# EAGLE board The Flying Jalapeno-panel_v10 (EAGLE 7.5.0), part 1 of 4
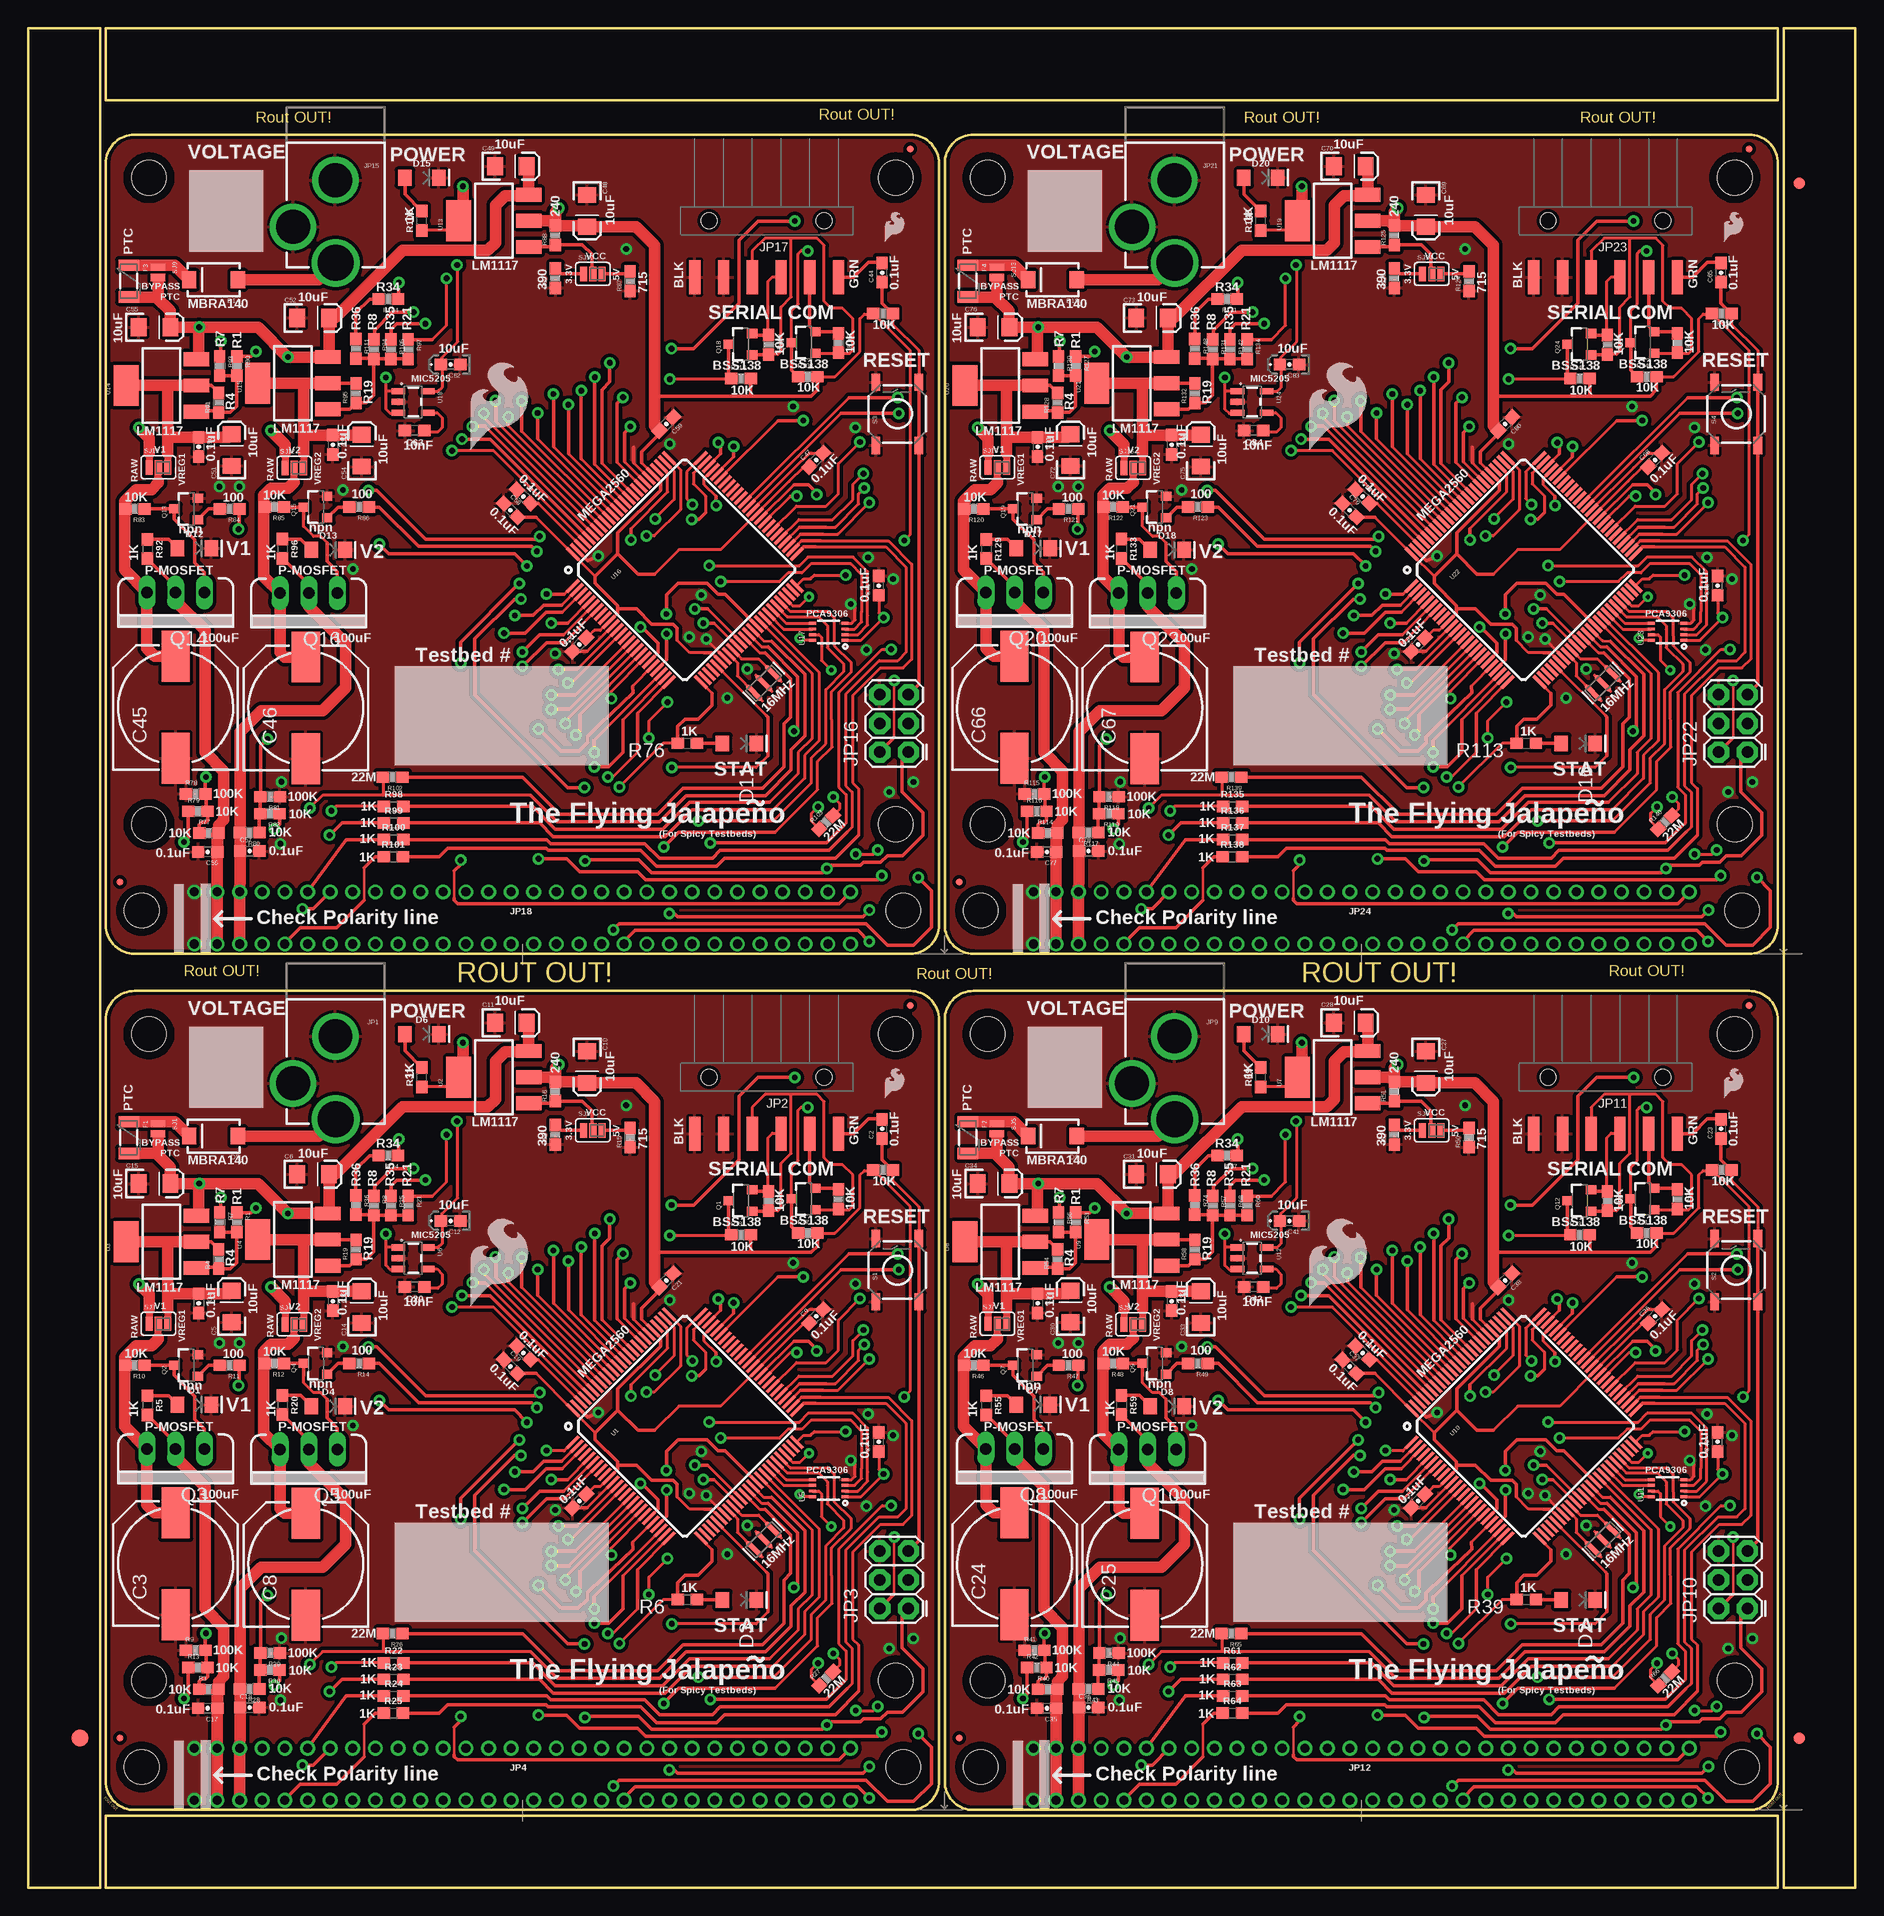
[diagram p0: board, top side]
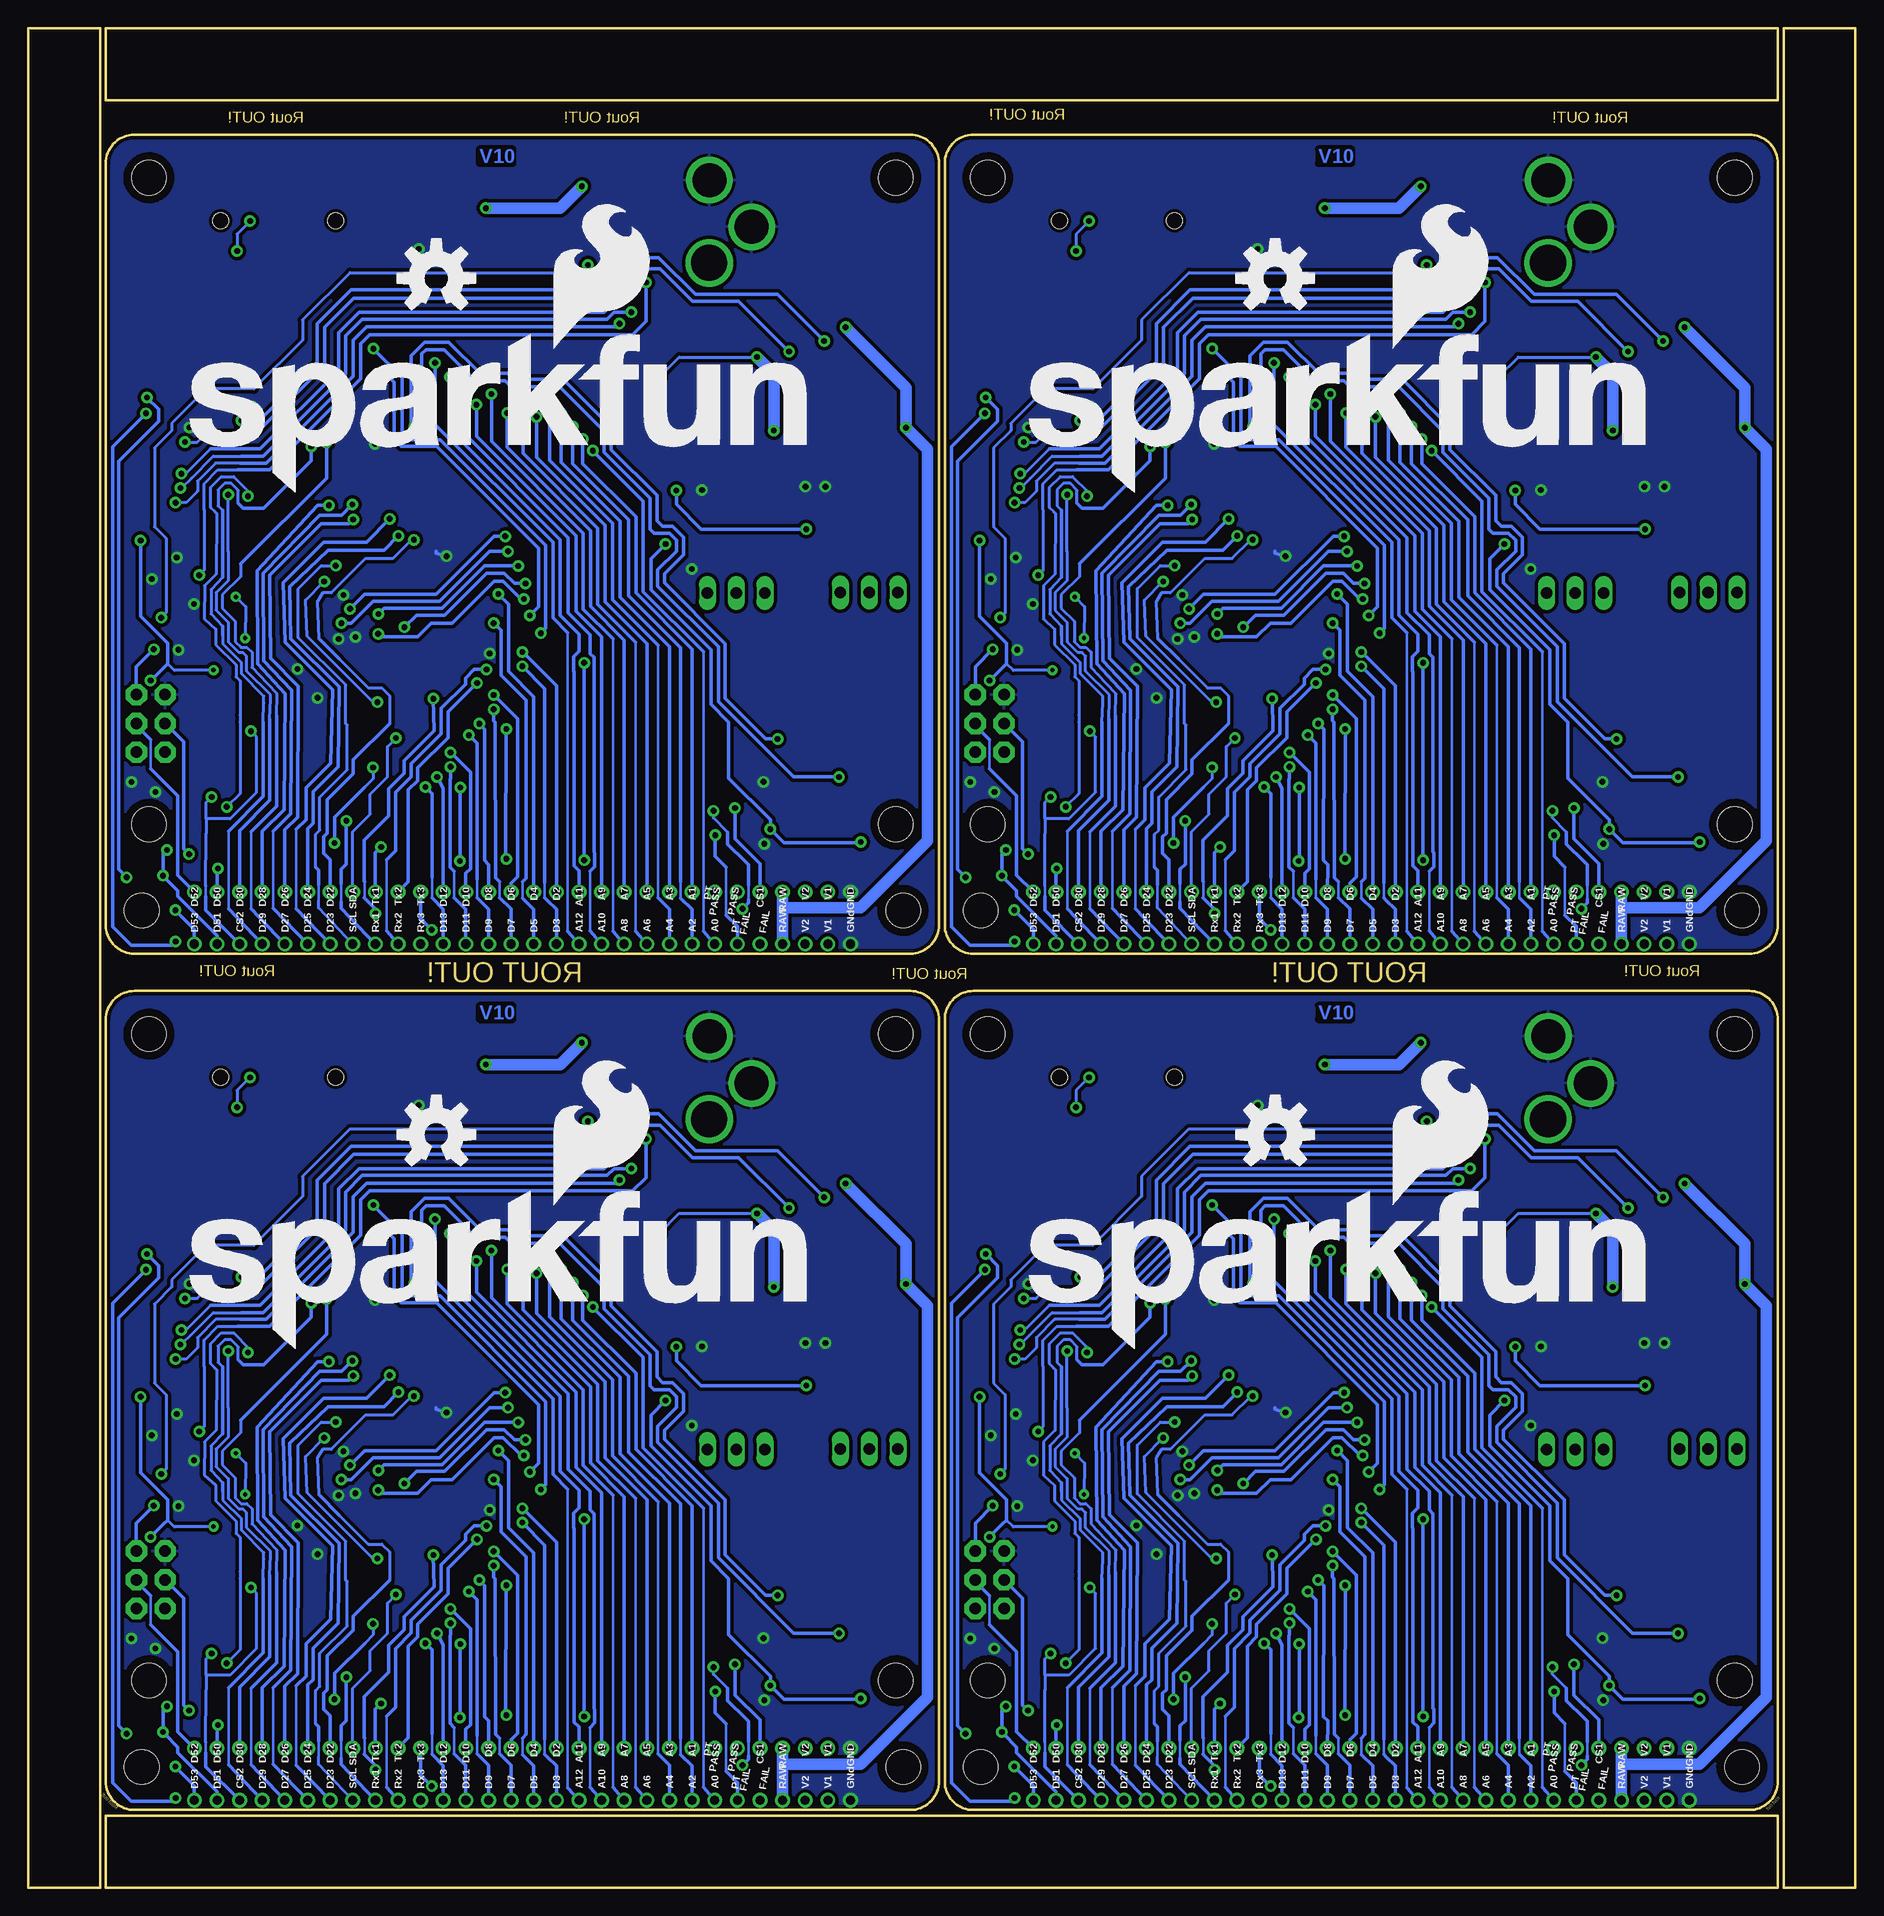
[diagram p1: board, bottom side, seen from below]

Size 161.54 x 164.34 mm. Coordinates in mm from the lower left corner, seen from the top.
Outline: 6.35,79.25 6.35,0 0,0 0,29.72
Outline: 0,27.18 0,164.34 6.35,164.34 6.35,76.71
Outline: 79.25,0 6.86,0 6.86,6.35 29.72,6.35
Outline: 27.18,6.35 154.69,6.35 154.69,0 76.71,0
Outline: 82.3,164.34 154.69,164.34 154.69,157.99 131.83,157.99
Outline: 134.37,157.99 6.86,157.99 6.86,164.34 84.84,164.34
Outline: 155.19,82.55 155.19,164.34 161.54,164.34 161.54,132.08
Outline: 161.54,134.62 161.54,0 155.19,0 155.19,85.09
Outline: 6.86,76.71 6.86,9.4 arc90 9.4,6.86 77.98,6.86 arc90 80.52,9.4 80.52,76.71 arc90 77.98,79.25 9.4,79.25 arc90 6.86,76.71
Outline: 81.03,76.71 81.03,9.4 arc90 83.57,6.86 152.15,6.86 arc90 154.69,9.4 154.69,76.71 arc90 152.15,79.25 83.57,79.25 arc90 81.03,76.71
Outline: 6.86,152.4 6.86,85.09 arc90 9.4,82.55 77.98,82.55 arc90 80.52,85.09 80.52,152.4 arc90 77.98,154.94 9.4,154.94 arc90 6.86,152.4
Outline: 81.03,152.4 81.03,85.09 arc90 83.57,82.55 152.15,82.55 arc90 154.69,85.09 154.69,152.4 arc90 152.15,154.94 83.57,154.94 arc90 81.03,152.4
Copper layers (1*16): Top 0.035mm / dielectric 1.5mm / Bottom 0.035mm
Design rules "SparkFun *": minimum track width 7mil, minimum drill 15mil, track to track 8mil, track to pad 8mil, pad to pad 8mil, via to via 8mil, smd to smd 8mil, copper to edge 8mil, drill to drill 8mil, minimum pad ring 10mil, minimum via ring 10mil, stop-mask expansion 4mil, vias tented up to drill 20mil, thermal gap 10mil
Net classes: 0 default: width 0.203 mm; 1 BIG: width 0.203 mm; 2 POWER: width 0.203 mm; 10 12_mil: width 0.305 mm, drill 0.381 mm; 11 15_mil: width 0.381 mm, drill 0.381 mm
tRestrict: area 72.1,36.2 to 72.4,36.3; area 146.3,36.2 to 146.6,36.3; area 72.1,111.9 to 72.4,112; area 146.3,111.9 to 146.6,112

## Footprints (pad centres in the part's own frame; a part is rotated, then mirrored left to right if it is on the bottom)
0603-CAP = smd 1.1 x 1: 1 -0.85,0; 2 0.85,0
NIC_10X10.5_CAP = smd 4.5 x 2.5: + 4.5,0; - -4.5,0
EIA3216 = smd 1.4 x 1.6: A 1.4,0; C -1.4,0
0603-POL = smd 1.1 x 1: A 0.85,0; K -0.85,0
0603 = smd 1.1 x 1: 1 -0.85,0; 2 0.85,0
LED-1206 = smd 1.2 x 1.4: A -1.5,0; C 1.5,0
SMA-DIODE = smd 1.27 x 1.47: A -2.15,0; C 2.15,0
FIDUCIAL-1.5X3 = smd 1.5 x 1.5: 1 0,0
FIDUCIAL-1X2 = smd 1 x 1: 1 0,0
PTC-1206 = smd 1 x 1.8: 1 -1.4,0; 2 1.4,0
POWER_JACK_PTH_LOCK = drill 2.997 pad 4.115: GND 0.025,6.557; GNDBREAK 3.762,10.7 | drill 3.2 pad 4.115: PWR 0,13.878
FTDI_DEVICE_RA_SMT = smd 1 x 3: 1 -6.35,5; 2 -3.81,5; 3 -1.27,5; 4 1.27,5; 5 3.81,5; 6 6.35,5 | hole 1.4: -5.08,0; 5.08,0
2X3 = drill 1.016 pad 1.88 octagon: 1 0,0; 2 0,2.54; 3 2.54,0; 4 2.54,2.54; 5 5.08,0; 6 5.08,2.54
FLYING_JALAPENO_V2_F = drill 0.8 pad 1.25: 1 -29,5.45; 2 -27,5.45; 3 -25,5.45; 4 -23,5.45; 5 -21,5.45; 6 -19,5.45; 7 -17,5.45; 8 -15,5.45; 9 -13,5.45; 10 -11,5.45; 11 -9,5.45; 12 -7,5.45; 13 -5,5.45; 14 -3,5.45; 15 -1,5.45; 16 1,5.45; 17 3,5.45; 18 5,5.45; 19 7,5.45; 20 9,5.45; 21 11,5.45; 22 13,5.45; 23 15,5.45; 24 17,5.45; 25 19,5.45; 26 21,5.45; 27 23,5.45; 28 25,5.45; 29 27,5.45; 30 29,5.45; 31 -29,0.85; 32 -27,0.85; 33 -25,0.85; 34 -23,0.85; 35 -21,0.85; 36 -19,0.85; 37 -17,0.85; 38 -15,0.85; 39 -13,0.85; 40 -11,0.85; 41 -9,0.85; 42 -7,0.85; 43 -5,0.85; 44 -3,0.85; 45 -1,0.85; 46 1,0.85; 47 3,0.85; 48 5,0.85; 49 7,0.85; 50 9,0.85; 51 11,0.85; 52 13,0.85; 53 15,0.85; 54 17,0.85; 55 19,0.85; 56 21,0.85; 57 23,0.85; 58 25,0.85; 59 27,0.85; 60 29,0.85 | hole 3.048: 33.655,3.81; -33.655,3.81
MICRO-FIDUCIAL = smd 0.635 x 0.635: 1 0,0
SOT23-3 = smd 0.8 x 0.9: 1 -0.95,-1; 2 0.95,-1; 3 0,1.1
TO220V = drill 1.016 long: 1 -2.54,0; 2 0,0; 3 2.54,0
0603-RES = smd 1.1 x 1: 1 -0.85,0; 2 0.85,0
TACTILE-SWITCH-SMD = smd 1.524 x 0.762: 1 -2.794,1.905; 2 2.794,1.905; 3 -2.794,-1.905; 4 2.794,-1.905
PAD-JUMPER-2-NO_NO_SILK = smd 0.635 x 1.27: 1 -0.45,0; 2 0.45,0
PAD-JUMPER-3-2OF3_NC_BY_PASTE_YES_SILK_FULL_BOX = smd 0.635 x 1.27: 1 -0.813,0; 2 0,0; 3 0.813,0
STAND-OFF-TIGHT = hole 3.048: 0,0
TQFP100 = smd 1.5 x 0.3: 1 -8,6; 2 -8,5.5; 3 -8,5; 4 -8,4.5; 5 -8,4; 6 -8,3.5; 7 -8,3; 8 -8,2.5; 9 -8,2; 10 -8,1.5; 11 -8,1; 12 -8,0.5; 13 -8,0; 14 -8,-0.5; 15 -8,-1; 16 -8,-1.5; 17 -8,-2; 18 -8,-2.5; 19 -8,-3; 20 -8,-3.5; 21 -8,-4; 22 -8,-4.5; 23 -8,-5; 24 -8,-5.5; 25 -8,-6; 51 8,-6; 52 8,-5.5; 53 8,-5; 54 8,-4.5; 55 8,-4; 56 8,-3.5; 57 8,-3; 58 8,-2.5; 59 8,-2; 60 8,-1.5; 61 8,-1; 62 8,-0.5; 63 8,0; 64 8,0.5; 65 8,1; 66 8,1.5; 67 8,2; 68 8,2.5; 69 8,3; 70 8,3.5; 71 8,4; 72 8,4.5; 73 8,5; 74 8,5.5; 75 8,6 | smd 0.3 x 1.5: 26 -6,-8; 27 -5.5,-8; 28 -5,-8; 29 -4.5,-8; 30 -4,-8; 31 -3.5,-8; 32 -3,-8; 33 -2.5,-8; 34 -2,-8; 35 -1.5,-8; 36 -1,-8; 37 -0.5,-8; 38 0,-8; 39 0.5,-8; 40 1,-8; 41 1.5,-8; 42 2,-8; 43 2.5,-8; 44 3,-8; 45 3.5,-8; 46 4,-8; 47 4.5,-8; 48 5,-8; 49 5.5,-8; 50 6,-8; 76 6,8; 77 5.5,8; 78 5,8; 79 4.5,8; 80 4,8; 81 3.5,8; 82 3,8; 83 2.5,8; 84 2,8; 85 1.5,8; 86 1,8; 87 0.5,8; 88 0,8; 89 -0.5,8; 90 -1,8; 91 -1.5,8; 92 -2,8; 93 -2.5,8; 94 -3,8; 95 -3.5,8; 96 -4,8; 97 -4.5,8; 98 -5,8; 99 -5.5,8; 100 -6,8
SOT223 = smd 1.219 x 2.235: 1 -2.311,-3.099; 2 0,-3.099; 3 2.311,-3.099 | smd 3.6 x 2.2: 4 0,3.099
PCA9306DC-1:1 = smd 0.25 x 0.602: 1 -0.73,-1.446; 2 -0.23,-1.446; 3 0.27,-1.446; 4 0.77,-1.446; 5 0.77,1.431; 6 0.27,1.431; 7 -0.23,1.431; 8 -0.73,1.431
SOT23-5 = smd 0.55 x 1.2: 1 -0.95,-1.3; 2 0,-1.3; 3 0.95,-1.3; 4 0.95,1.3; 5 -0.95,1.3
RESONATOR-SMD = smd 0.45 x 1.905: 1 -1.2,0; 2 0,0; 3 1.2,0

## Placement (x,y rotation side)
C1  0.1uF  [0603-CAP]  43.79,47.27 315 top
C2  0.1uF  [0603-CAP]  75.49,67.06 90 top
C3  100uF  [NIC_10X10.5_CAP]  13.03,28.63 90 top
C4  0.1uF  [0603-CAP]  15.06,51.64 270 top
C5  10uF  [EIA3216]  17.98,51.36 90 top
C6  10uF  [EIA3216]  25.18,63.04 0 top
C7  0.1uF  [0603-CAP]  75.19,39.39 90 top
C8  100uF  [NIC_10X10.5_CAP]  24.54,28.57 90 top
C9  0.1uF  [0603-CAP]  69.65,50.5 45 top
C10  10uF  [EIA3216]  49.4,72.52 270 top
C11  10uF  [EIA3216]  42.67,76.45 0 top
C12  10uF  [0603-POL]  37.34,58.93 180 top
C13  0.1uF  [0603-CAP]  26.92,51.84 270 top
C14  10uF  [EIA3216]  29.49,51.31 90 top
C15  10uF  [EIA3216]  11.18,62.23 0 top
C16  0.1uF  [0603-CAP]  117.96,47.27 315 top
C17  0.1uF  [0603-CAP]  15.88,15.85 180 top
C18  0.1uF  [0603-CAP]  19.58,15.93 0 top
C19  0.1uF  [0603-CAP]  42.64,46.05 315 top
C20  10nF  [0603]  34.16,53.09 180 top
C21  0.1uF  [0603-CAP]  56.41,53.67 225 top
C22  0.1uF  [0603-CAP]  48.72,34.16 45 top
C23  0.1uF  [0603-CAP]  149.65,67.06 90 top
C24  100uF  [NIC_10X10.5_CAP]  87.2,28.63 90 top
C25  100uF  [NIC_10X10.5_CAP]  98.7,28.57 90 top
C26  0.1uF  [0603-CAP]  143.82,50.5 45 top
C27  10uF  [EIA3216]  123.57,72.52 270 top
C28  10uF  [EIA3216]  116.84,76.45 0 top
C29  0.1uF  [0603-CAP]  89.23,51.64 270 top
C30  10uF  [EIA3216]  92.15,51.36 90 top
C31  10uF  [EIA3216]  99.35,63.04 0 top
C32  0.1uF  [0603-CAP]  101.09,51.84 270 top
C33  10uF  [EIA3216]  103.66,51.31 90 top
C34  10uF  [EIA3216]  85.34,62.23 0 top
C35  0.1uF  [0603-CAP]  90.04,15.85 180 top
C36  0.1uF  [0603-CAP]  93.75,15.93 0 top
C37  0.1uF  [0603-CAP]  116.81,46.05 315 top
C38  0.1uF  [0603-CAP]  130.58,53.67 225 top
C39  0.1uF  [0603-CAP]  122.89,34.16 45 top
C40  0.1uF  [0603-CAP]  149.36,39.39 90 top
C41  10uF  [0603-POL]  111.51,58.93 180 top
C42  10nF  [0603]  108.33,53.09 180 top
C43  0.1uF  [0603-CAP]  43.79,122.96 315 top
C44  0.1uF  [0603-CAP]  75.49,142.75 90 top
C45  100uF  [NIC_10X10.5_CAP]  13.03,104.32 90 top
C46  100uF  [NIC_10X10.5_CAP]  24.54,104.27 90 top
C47  0.1uF  [0603-CAP]  69.65,126.19 45 top
C48  10uF  [EIA3216]  49.4,148.21 270 top
C49  10uF  [EIA3216]  42.67,152.15 0 top
C50  0.1uF  [0603-CAP]  15.06,127.33 270 top
C51  10uF  [EIA3216]  17.98,127.05 90 top
C52  10uF  [EIA3216]  25.18,138.73 0 top
C53  0.1uF  [0603-CAP]  26.92,127.53 270 top
C54  10uF  [EIA3216]  29.49,127 90 top
C55  10uF  [EIA3216]  11.18,137.92 0 top
C56  0.1uF  [0603-CAP]  15.88,91.54 180 top
C57  0.1uF  [0603-CAP]  19.58,91.62 0 top
C58  0.1uF  [0603-CAP]  42.64,121.74 315 top
C59  0.1uF  [0603-CAP]  56.41,129.36 225 top
C60  0.1uF  [0603-CAP]  48.72,109.86 45 top
C61  0.1uF  [0603-CAP]  75.19,115.08 90 top
C62  10uF  [0603-POL]  37.34,134.62 180 top
C63  10nF  [0603]  34.16,128.78 180 top
C64  0.1uF  [0603-CAP]  117.96,122.96 315 top
C65  0.1uF  [0603-CAP]  149.65,142.75 90 top
C66  100uF  [NIC_10X10.5_CAP]  87.2,104.32 90 top
C67  100uF  [NIC_10X10.5_CAP]  98.7,104.27 90 top
C68  0.1uF  [0603-CAP]  143.82,126.19 45 top
C69  10uF  [EIA3216]  123.57,148.21 270 top
C70  10uF  [EIA3216]  116.84,152.15 0 top
C71  0.1uF  [0603-CAP]  89.23,127.33 270 top
C72  10uF  [EIA3216]  92.15,127.05 90 top
C73  10uF  [EIA3216]  99.35,138.73 0 top
C74  0.1uF  [0603-CAP]  101.09,127.53 270 top
C75  10uF  [EIA3216]  103.66,127 90 top
C76  10uF  [EIA3216]  85.34,137.92 0 top
C77  0.1uF  [0603-CAP]  90.04,91.54 180 top
C78  0.1uF  [0603-CAP]  93.75,91.62 0 top
C79  0.1uF  [0603-CAP]  116.81,121.74 315 top
C80  0.1uF  [0603-CAP]  130.58,129.36 225 top
C81  0.1uF  [0603-CAP]  122.89,109.86 45 top
C82  0.1uF  [0603-CAP]  149.36,115.08 90 top
C83  10uF  [0603-POL]  111.51,134.62 180 top
C84  10nF  [0603]  108.33,128.78 180 top
D1  RED  [LED-1206]  14.68,42.68 0 top
D2  RED  [LED-1206]  137.03,25.43 0 top
D3  RED  [LED-1206]  62.86,25.43 0 top
D4  RED  [LED-1206]  26.52,42.54 0 top
D5  MBRA140  [SMA-DIODE]  16.38,66.42 180 top
D6  RED  [LED-1206]  34.8,75.44 0 top
D7  RED  [LED-1206]  88.85,42.68 0 top
D8  RED  [LED-1206]  100.69,42.54 0 top
D9  MBRA140  [SMA-DIODE]  90.55,66.42 180 top
D10  RED  [LED-1206]  108.97,75.44 0 top
D11  RED  [LED-1206]  62.86,101.12 0 top
D12  RED  [LED-1206]  14.68,118.38 0 top
D13  RED  [LED-1206]  26.52,118.24 0 top
D14  MBRA140  [SMA-DIODE]  16.38,142.11 180 top
D15  RED  [LED-1206]  34.8,151.13 0 top
D16  RED  [LED-1206]  137.03,101.12 0 top
D17  RED  [LED-1206]  88.85,118.38 0 top
D18  RED  [LED-1206]  100.69,118.24 0 top
D19  MBRA140  [SMA-DIODE]  90.55,142.11 180 top
D20  RED  [LED-1206]  108.97,151.13 0 top
E$1  [FIDUCIAL-1.5X3]  4.57,13.21 0 top
E$7  [FIDUCIAL-1X2]  156.59,150.62 180 top
E$8  [FIDUCIAL-1X2]  156.59,13.21 0 top
F1  [PTC-1206]  8.89,66.29 270 top
F2  [PTC-1206]  83.06,66.29 270 top
F3  [PTC-1206]  8.89,141.99 270 top
F4  [PTC-1206]  83.06,141.99 270 top
JP1  7V  [POWER_JACK_PTH_LOCK]  27.18,81.79 180 top
JP2  FTDI  [FTDI_DEVICE_RA_SMT]  65.28,71.63 180 top
JP3  [2X3]  77.81,24.66 90 top
JP4  2x30 RA FEMALE HEADER  [FLYING_JALAPENO_V2_F]  43.69,6.86 0 top
JP5  FIDUCIALUFIDUCIAL  [MICRO-FIDUCIAL]  8.13,13.21 90 top
JP6  FIDUCIALUFIDUCIAL  [MICRO-FIDUCIAL]  82.3,13.21 90 top
JP7  FIDUCIALUFIDUCIAL  [MICRO-FIDUCIAL]  152.15,77.98 90 top
JP8  FIDUCIALUFIDUCIAL  [MICRO-FIDUCIAL]  77.98,77.98 90 top
JP9  7V  [POWER_JACK_PTH_LOCK]  101.35,81.79 180 top
JP10  [2X3]  151.98,24.66 90 top
JP11  FTDI  [FTDI_DEVICE_RA_SMT]  139.45,71.63 180 top
JP12  2x30 RA FEMALE HEADER  [FLYING_JALAPENO_V2_F]  117.86,6.86 0 top
JP13  FIDUCIALUFIDUCIAL  [MICRO-FIDUCIAL]  8.13,88.9 90 top
JP14  FIDUCIALUFIDUCIAL  [MICRO-FIDUCIAL]  77.98,153.67 90 top
JP15  7V  [POWER_JACK_PTH_LOCK]  27.18,157.48 180 top
JP16  [2X3]  77.81,100.36 90 top
JP17  FTDI  [FTDI_DEVICE_RA_SMT]  65.28,147.32 180 top
JP18  2x30 RA FEMALE HEADER  [FLYING_JALAPENO_V2_F]  43.69,82.55 0 top
JP19  FIDUCIALUFIDUCIAL  [MICRO-FIDUCIAL]  82.3,88.9 90 top
JP20  FIDUCIALUFIDUCIAL  [MICRO-FIDUCIAL]  152.15,153.67 90 top
JP21  7V  [POWER_JACK_PTH_LOCK]  101.35,157.48 180 top
JP22  [2X3]  151.98,100.36 90 top
JP23  FTDI  [FTDI_DEVICE_RA_SMT]  139.45,147.32 180 top
JP24  2x30 RA FEMALE HEADER  [FLYING_JALAPENO_V2_F]  117.86,82.55 0 top
LOGO1  SFE_LOGO_NAME_FLAME.5_INCH  [SFE_LOGO_NAME_FLAME_.5]  73.89,47.32 0 bottom
LOGO2  SFE_LOGO_FLAME.3_INCH  [SFE_LOGO_FLAME_.3]  38.61,51.31 0 top
LOGO3  SFE_LOGO_FLAME.1_INCH  [SFE_LOGO_FLAME_.1]  75.44,69.47 0 top
LOGO4  OSHW-LOGOL  [OSHW-LOGO-L]  51.31,66.55 0 bottom
LOGO5  SFE_LOGO_NAME_FLAME.5_INCH  [SFE_LOGO_NAME_FLAME_.5]  148.06,47.32 0 bottom
LOGO6  SFE_LOGO_FLAME.1_INCH  [SFE_LOGO_FLAME_.1]  149.61,69.47 0 top
LOGO7  OSHW-LOGOL  [OSHW-LOGO-L]  125.48,66.55 0 bottom
LOGO8  SFE_LOGO_FLAME.3_INCH  [SFE_LOGO_FLAME_.3]  112.78,51.31 0 top
LOGO9  SFE_LOGO_NAME_FLAME.5_INCH  [SFE_LOGO_NAME_FLAME_.5]  73.89,123.01 0 bottom
LOGO10  SFE_LOGO_FLAME.1_INCH  [SFE_LOGO_FLAME_.1]  75.44,145.16 0 top
LOGO11  OSHW-LOGOL  [OSHW-LOGO-L]  51.31,142.24 0 bottom
LOGO12  SFE_LOGO_FLAME.3_INCH  [SFE_LOGO_FLAME_.3]  38.61,127 0 top
LOGO13  SFE_LOGO_NAME_FLAME.5_INCH  [SFE_LOGO_NAME_FLAME_.5]  148.06,123.01 0 bottom
LOGO14  SFE_LOGO_FLAME.1_INCH  [SFE_LOGO_FLAME_.1]  149.61,145.16 0 top
LOGO15  OSHW-LOGOL  [OSHW-LOGO-L]  125.48,142.24 0 bottom
LOGO16  SFE_LOGO_FLAME.3_INCH  [SFE_LOGO_FLAME_.3]  112.78,127 0 top
Q1  BSS138, 200mA/50V  [SOT23-3]  63,60.72 90 top
Q2  MMBT2222A  [SOT23-3]  14,46.16 90 top
Q3  NDP6020P  [TO220V]  13.03,38.79 180 top
Q4  MMBT2222A  [SOT23-3]  25.44,46.33 90 top
Q5  NDP6020P  [TO220V]  24.79,38.73 180 top
Q6  BSS138, 200mA/50V  [SOT23-3]  68.59,60.87 90 top
Q7  MMBT2222A  [SOT23-3]  88.16,46.16 90 top
Q8  NDP6020P  [TO220V]  87.2,38.79 180 top
Q9  MMBT2222A  [SOT23-3]  99.61,46.33 90 top
Q10  NDP6020P  [TO220V]  98.96,38.73 180 top
Q11  BSS138, 200mA/50V  [SOT23-3]  142.76,60.87 90 top
Q12  BSS138, 200mA/50V  [SOT23-3]  137.17,60.72 90 top
Q13  MMBT2222A  [SOT23-3]  14,121.86 90 top
Q14  NDP6020P  [TO220V]  13.03,114.48 180 top
Q15  MMBT2222A  [SOT23-3]  25.44,122.02 90 top
Q16  NDP6020P  [TO220V]  24.79,114.43 180 top
Q17  BSS138, 200mA/50V  [SOT23-3]  68.59,136.56 90 top
Q18  BSS138, 200mA/50V  [SOT23-3]  63,136.41 90 top
Q19  MMBT2222A  [SOT23-3]  88.16,121.86 90 top
Q20  NDP6020P  [TO220V]  87.2,114.48 180 top
Q21  MMBT2222A  [SOT23-3]  99.61,122.02 90 top
Q22  NDP6020P  [TO220V]  98.96,114.43 180 top
Q23  BSS138, 200mA/50V  [SOT23-3]  142.76,136.56 90 top
Q24  BSS138, 200mA/50V  [SOT23-3]  137.17,136.41 90 top
R1  715  [0603-RES]  18.44,58.8 270 top
R2  10K  [0603-RES]  75.56,63.43 180 top
R3  10K  [0603-RES]  15.96,17.53 0 top
R4  240  [0603-RES]  16.84,55.55 90 top
R5  1k  [0603]  10.53,42.62 270 top
R6  1k  [0603]  58.27,25.45 0 top
R7  390  [0603-RES]  16.92,58.8 270 top
R8  390  [0603-RES]  30.54,60.27 270 top
R9  100k  [0603-RES]  14.8,20.98 0 top
R10  10K  [0603-RES]  9.42,46.16 180 top
R11  100  [0603-RES]  17.81,46.16 180 top
R12  10K  [0603-RES]  21.76,46.33 180 top
R13  10K  [0603-RES]  15,19.44 0 top
R14  100  [0603-RES]  29.25,46.33 180 top
R15  715  [0603-RES]  53.21,66.29 90 top
R16  240  [0603-RES]  46.61,70.36 90 top
R17  10K  [0603-RES]  68.92,57.85 0 top
R18  390  [0603-RES]  46.61,66.55 90 top
R19  240  [0603-RES]  28.98,56.39 90 top
R20  1k  [0603]  22.48,42.65 270 top
R21  715  [0603-RES]  33.59,60.27 270 top
R22  1k  [0603]  32.31,19.86 0 top
R23  1k  [0603]  32.31,18.41 0 top
R24  1k  [0603]  32.31,16.94 0 top
R25  1k  [0603]  32.28,15.42 0 top
R26  22M  [0603-RES]  32.21,22.45 180 top
R27  22M  [0603-RES]  70.54,18.47 45 top
R28  10K  [0603-RES]  19.57,17.55 180 top
R29  100k  [0603-RES]  21.39,20.73 180 top
R30  10K  [0603-RES]  21.36,19.23 180 top
R31  1k  [0603]  34.8,71.63 90 top
R32  10K  [0603-RES]  65.44,60.68 270 top
R33  10K  [0603-RES]  63.02,57.7 0 top
R34  100  [0603-RES]  31.83,64.71 180 top
R35  470  [0603-RES]  32.07,60.27 270 top
R36  470  [0603-RES]  28.96,60.32 270 top
R37  10K  [0603-RES]  71.63,60.83 270 top
R38  10K  [0603-RES]  149.73,63.43 180 top
R39  1k  [0603]  132.44,25.45 0 top
R40  10K  [0603-RES]  90.13,17.53 0 top
R41  100k  [0603-RES]  88.96,20.98 0 top
R42  10K  [0603-RES]  89.17,19.44 0 top
R43  10K  [0603-RES]  93.74,17.55 180 top
R44  100k  [0603-RES]  95.55,20.73 180 top
R45  10K  [0603-RES]  95.53,19.23 180 top
R46  10K  [0603-RES]  83.59,46.16 180 top
R47  100  [0603-RES]  91.97,46.16 180 top
R48  10K  [0603-RES]  95.92,46.33 180 top
R49  100  [0603-RES]  103.42,46.33 180 top
R50  715  [0603-RES]  127.38,66.29 90 top
R51  240  [0603-RES]  120.78,70.36 90 top
R52  390  [0603-RES]  120.78,66.55 90 top
R53  715  [0603-RES]  92.61,58.8 270 top
R54  240  [0603-RES]  91.01,55.55 90 top
R55  1k  [0603]  84.7,42.62 270 top
R56  390  [0603-RES]  91.08,58.8 270 top
R57  390  [0603-RES]  104.71,60.27 270 top
R58  240  [0603-RES]  103.15,56.39 90 top
R59  1k  [0603]  96.65,42.65 270 top
R60  715  [0603-RES]  107.76,60.27 270 top
R61  1k  [0603]  106.48,19.86 0 top
R62  1k  [0603]  106.48,18.41 0 top
R63  1k  [0603]  106.48,16.94 0 top
R64  1k  [0603]  106.45,15.42 0 top
R65  22M  [0603-RES]  106.38,22.45 180 top
R66  22M  [0603-RES]  144.71,18.47 45 top
R67  100  [0603-RES]  105.99,64.71 180 top
R68  470  [0603-RES]  106.24,60.27 270 top
R69  1k  [0603]  108.97,71.63 90 top
R70  10K  [0603-RES]  145.8,60.83 270 top
R71  10K  [0603-RES]  143.09,57.85 0 top
R72  10K  [0603-RES]  139.61,60.68 270 top
R73  10K  [0603-RES]  137.19,57.7 0 top
R74  470  [0603-RES]  103.12,60.32 270 top
R75  10K  [0603-RES]  75.56,139.12 180 top
R76  1k  [0603]  58.27,101.14 0 top
R77  10K  [0603-RES]  15.96,93.22 0 top
R78  100k  [0603-RES]  14.8,96.67 0 top
R79  10K  [0603-RES]  15,95.14 0 top
R80  10K  [0603-RES]  19.57,93.24 180 top
R81  100k  [0603-RES]  21.39,96.42 180 top
R82  10K  [0603-RES]  21.36,94.92 180 top
R83  10K  [0603-RES]  9.42,121.86 180 top
R84  100  [0603-RES]  17.81,121.86 180 top
R85  10K  [0603-RES]  21.76,122.02 180 top
R86  100  [0603-RES]  29.25,122.02 180 top
R87  715  [0603-RES]  53.21,141.99 90 top
R88  240  [0603-RES]  46.61,146.05 90 top
R89  390  [0603-RES]  46.61,142.24 90 top
R90  715  [0603-RES]  18.44,134.49 270 top
R91  240  [0603-RES]  16.84,131.24 90 top
R92  1k  [0603]  10.53,118.31 270 top
R93  390  [0603-RES]  16.92,134.49 270 top
R94  390  [0603-RES]  30.54,135.97 270 top
R95  240  [0603-RES]  28.98,132.08 90 top
R96  1k  [0603]  22.48,118.34 270 top
R97  715  [0603-RES]  33.59,135.97 270 top
R98  1k  [0603]  32.31,95.55 0 top
R99  1k  [0603]  32.31,94.11 0 top
R100  1k  [0603]  32.31,92.63 0 top
R101  1k  [0603]  32.28,91.11 0 top
R102  22M  [0603-RES]  32.21,98.15 180 top
R103  22M  [0603-RES]  70.54,94.16 45 top
R104  100  [0603-RES]  31.83,140.4 180 top
R105  470  [0603-RES]  32.07,135.97 270 top
R106  1k  [0603]  34.8,147.32 90 top
R107  10K  [0603-RES]  71.63,136.53 270 top
R108  10K  [0603-RES]  68.92,133.54 0 top
R109  10K  [0603-RES]  65.44,136.37 270 top
R110  10K  [0603-RES]  63.02,133.39 0 top
R111  470  [0603-RES]  28.96,136.02 270 top
R112  10K  [0603-RES]  149.73,139.12 180 top
R113  1k  [0603]  132.44,101.14 0 top
R114  10K  [0603-RES]  90.13,93.22 0 top
R115  100k  [0603-RES]  88.96,96.67 0 top
R116  10K  [0603-RES]  89.17,95.14 0 top
R117  10K  [0603-RES]  93.74,93.24 180 top
R118  100k  [0603-RES]  95.55,96.42 180 top
R119  10K  [0603-RES]  95.53,94.92 180 top
R120  10K  [0603-RES]  83.59,121.86 180 top
R121  100  [0603-RES]  91.97,121.86 180 top
R122  10K  [0603-RES]  95.92,122.02 180 top
R123  100  [0603-RES]  103.42,122.02 180 top
R124  715  [0603-RES]  127.38,141.99 90 top
R125  240  [0603-RES]  120.78,146.05 90 top
R126  390  [0603-RES]  120.78,142.24 90 top
R127  715  [0603-RES]  92.61,134.49 270 top
R128  240  [0603-RES]  91.01,131.24 90 top
R129  1k  [0603]  84.7,118.31 270 top
R130  390  [0603-RES]  91.08,134.49 270 top
R131  390  [0603-RES]  104.71,135.97 270 top
R132  240  [0603-RES]  103.15,132.08 90 top
R133  1k  [0603]  96.65,118.34 270 top
R134  715  [0603-RES]  107.76,135.97 270 top
R135  1k  [0603]  106.48,95.55 0 top
R136  1k  [0603]  106.48,94.11 0 top
R137  1k  [0603]  106.48,92.63 0 top
R138  1k  [0603]  106.45,91.11 0 top
R139  22M  [0603-RES]  106.38,98.15 180 top
R140  22M  [0603-RES]  144.71,94.16 45 top
R141  100  [0603-RES]  105.99,140.4 180 top
R142  470  [0603-RES]  106.24,135.97 270 top
R143  1k  [0603]  108.97,147.32 90 top
R144  10K  [0603-RES]  145.8,136.53 270 top
R145  10K  [0603-RES]  143.09,133.54 0 top
R146  10K  [0603-RES]  139.61,136.37 270 top
R147  10K  [0603-RES]  137.19,133.39 0 top
R148  470  [0603-RES]  103.12,136.02 270 top
S1  [TACTILE-SWITCH-SMD]  76.84,54.57 90 top
S2  [TACTILE-SWITCH-SMD]  151,54.57 90 top
S3  [TACTILE-SWITCH-SMD]  76.84,130.26 90 top
S4  [TACTILE-SWITCH-SMD]  151,130.26 90 top
SJ1  PTC Bypass  [PAD-JUMPER-2-NO_NO_SILK]  11.47,67.07 270 top
SJ2  [PAD-JUMPER-3-2OF3_NC_BY_PASTE_YES_SILK_FULL_BOX]  49.91,66.93 0 top
SJ3  [PAD-JUMPER-3-2OF3_NC_BY_PASTE_YES_SILK_FULL_BOX]  11.51,49.83 0 top
SJ4  [PAD-JUMPER-3-2OF3_NC_BY_PASTE_YES_SILK_FULL_BOX]  23.52,49.78 0 top
SJ5  PTC Bypass  [PAD-JUMPER-2-NO_NO_SILK]  85.64,67.07 270 top
SJ6  [PAD-JUMPER-3-2OF3_NC_BY_PASTE_YES_SILK_FULL_BOX]  124.08,66.93 0 top
SJ7  [PAD-JUMPER-3-2OF3_NC_BY_PASTE_YES_SILK_FULL_BOX]  85.67,49.83 0 top
SJ8  [PAD-JUMPER-3-2OF3_NC_BY_PASTE_YES_SILK_FULL_BOX]  97.69,49.78 0 top
SJ9  PTC Bypass  [PAD-JUMPER-2-NO_NO_SILK]  11.47,142.76 270 top
SJ10  [PAD-JUMPER-3-2OF3_NC_BY_PASTE_YES_SILK_FULL_BOX]  49.91,142.62 0 top
SJ11  [PAD-JUMPER-3-2OF3_NC_BY_PASTE_YES_SILK_FULL_BOX]  11.51,125.53 0 top
SJ12  [PAD-JUMPER-3-2OF3_NC_BY_PASTE_YES_SILK_FULL_BOX]  23.52,125.48 0 top
SJ13  PTC Bypass  [PAD-JUMPER-2-NO_NO_SILK]  85.64,142.76 270 top
SJ14  [PAD-JUMPER-3-2OF3_NC_BY_PASTE_YES_SILK_FULL_BOX]  124.08,142.62 0 top
SJ15  [PAD-JUMPER-3-2OF3_NC_BY_PASTE_YES_SILK_FULL_BOX]  85.67,125.53 0 top
SJ16  [PAD-JUMPER-3-2OF3_NC_BY_PASTE_YES_SILK_FULL_BOX]  97.69,125.48 0 top
STANDOFF1  STAND-OFFTIGHT  [STAND-OFF-TIGHT]  10.67,18.29 0 top
STANDOFF2  STAND-OFFTIGHT  [STAND-OFF-TIGHT]  76.71,18.29 0 top
STANDOFF3  STAND-OFFTIGHT  [STAND-OFF-TIGHT]  76.71,75.44 0 top
STANDOFF4  STAND-OFFTIGHT  [STAND-OFF-TIGHT]  10.67,75.44 0 top
STANDOFF5  STAND-OFFTIGHT  [STAND-OFF-TIGHT]  84.84,18.29 0 top
STANDOFF6  STAND-OFFTIGHT  [STAND-OFF-TIGHT]  150.88,18.29 0 top
STANDOFF7  STAND-OFFTIGHT  [STAND-OFF-TIGHT]  150.88,75.44 0 top
STANDOFF8  STAND-OFFTIGHT  [STAND-OFF-TIGHT]  84.84,75.44 0 top
STANDOFF9  STAND-OFFTIGHT  [STAND-OFF-TIGHT]  10.67,93.98 0 top
STANDOFF10  STAND-OFFTIGHT  [STAND-OFF-TIGHT]  76.71,93.98 0 top
STANDOFF11  STAND-OFFTIGHT  [STAND-OFF-TIGHT]  76.71,151.13 0 top
STANDOFF12  STAND-OFFTIGHT  [STAND-OFF-TIGHT]  10.67,151.13 0 top
STANDOFF13  STAND-OFFTIGHT  [STAND-OFF-TIGHT]  84.84,93.98 0 top
STANDOFF14  STAND-OFFTIGHT  [STAND-OFF-TIGHT]  150.88,93.98 0 top
STANDOFF15  STAND-OFFTIGHT  [STAND-OFF-TIGHT]  150.88,151.13 0 top
STANDOFF16  STAND-OFFTIGHT  [STAND-OFF-TIGHT]  84.84,151.13 0 top
U1  ATMEGA2560AU  [TQFP100]  58.03,40.78 45 top
U2  LM1117  [SOT223]  41.15,71.63 90 top
U3  LM1117  [SOT223]  11.76,57.07 90 top
U4  LM1117  [SOT223]  23.39,57.28 90 top
U5  PCA9306  [PCA9306DC-1:1]  70.76,35.28 90 top
U6  3.3V MIC5205  [SOT23-5]  34.04,55.63 270 top
U7  LM1117  [SOT223]  115.32,71.63 90 top
U8  LM1117  [SOT223]  85.93,57.07 90 top
U9  LM1117  [SOT223]  97.56,57.28 90 top
U10  ATMEGA2560AU  [TQFP100]  132.2,40.78 45 top
U11  PCA9306  [PCA9306DC-1:1]  144.93,35.28 90 top
U12  3.3V MIC5205  [SOT23-5]  108.2,55.63 270 top
U13  LM1117  [SOT223]  41.15,147.32 90 top
U14  LM1117  [SOT223]  11.76,132.77 90 top
U15  LM1117  [SOT223]  23.39,132.97 90 top
U16  ATMEGA2560AU  [TQFP100]  58.03,116.47 45 top
U17  PCA9306  [PCA9306DC-1:1]  70.76,110.97 90 top
U18  3.3V MIC5205  [SOT23-5]  34.04,131.32 270 top
U19  LM1117  [SOT223]  115.32,147.32 90 top
U20  LM1117  [SOT223]  85.93,132.77 90 top
U21  LM1117  [SOT223]  97.56,132.97 90 top
U22  ATMEGA2560AU  [TQFP100]  132.2,116.47 45 top
U23  PCA9306  [PCA9306DC-1:1]  144.93,110.97 90 top
U24  3.3V MIC5205  [SOT23-5]  108.2,131.32 270 top
Y1  16MHZ  [RESONATOR-SMD]  65.02,30.76 225 top
Y2  16MHZ  [RESONATOR-SMD]  139.19,30.76 225 top
Y3  16MHZ  [RESONATOR-SMD]  65.02,106.46 225 top
Y4  16MHZ  [RESONATOR-SMD]  139.19,106.46 225 top

## Library data of the parts
C1 C2 C4 C7 C9 C13 C16-C19 C21-C23 C26 C29 C32 C35-C40 C43 C44 C47 C50 C53 C56-C61 C64 C65 C68 C71 C74 C77-C82 = SparkFun-Capacitors; PROD_ID: CAP-00810
C3 C8 C24 C25 C45 C46 C66 C67 = SparkFun-Capacitors; PROD_ID: CAP-08362
C5 C6 C10 C11 C14 C15 C27 C28 C30 C31 C33 C34 C48 C49 C51 C52 C54 C55 C69 C70 C72 C73 C75 C76 = SparkFun-Capacitors; PROD_ID: CAP-00811
C12 C41 C62 C83 = SparkFun-Capacitors; PROD_ID: CAP-13210
C20 C42 C63 C84 = SparkFun-Capacitors; PROD_ID: CAP-00867
D1-D4 D6-D8 D10-D13 D15-D18 D20 = SparkFun-LED; PROD_ID: DIO-09912
D5 D9 D14 D19 = SparkFun-DiscreteSemi; PROD_ID: DIO-08053
E$1 = SparkFun-Retired
E$7 E$8 LOGO1-LOGO16 = SparkFun-Aesthetics
F1-F4 = SparkFun-PowerIC; PROD_ID: RES-08585
JP1 JP9 JP15 JP21 = SparkFun-Connectors; PROD_ID: CONN-08197; SF_ID: PRT-00119
JP2 JP11 JP17 JP23 = SparkFun-Connectors; PROD_ID: CONN-08971
JP3 JP5-JP8 JP10 JP13 JP14 JP16 JP19 JP20 JP22 = SparkFun
JP4 JP12 JP18 JP24 = Testing; PROD_ID: CONN-13106
Q1 Q6 Q11 Q12 Q17 Q18 Q23 Q24 = SparkFun-DiscreteSemi; PROD_ID: TRANS-00830
Q2 Q4 Q7 Q9 Q13 Q15 Q19 Q21 = SparkFun-DiscreteSemi; PROD_ID: TRANS-08049
Q3 Q5 Q8 Q10 Q14 Q16 Q20 Q22 = SparkFun-DiscreteSemi; PROD_ID: TRANS-13060
R1 R15 R21 R50 R53 R60 R87 R90 R97 R124 R127 R134 = SparkFun-Resistors; PROD_ID: RES-07850
R2 R3 R10 R12 R13 R17 R28 R30 R32 R33 R37 R38 R40 R42 R43 R45 R46 R48 R70-R73 R75 R77 R79 R80 R82 R83 R85 R107-R110 R112 R114 R116 R117 R119 R120 R122 R144-R147 = SparkFun-Resistors; PROD_ID: RES-00824
R4 R16 R19 R51 R54 R58 R88 R91 R95 R125 R128 R132 = SparkFun-Resistors; PROD_ID: RES-07849
R5 R6 R20 R22-R25 R31 R39 R55 R59 R61-R64 R69 R76 R92 R96 R98-R101 R106 R113 R129 R133 R135-R138 R143 = SparkFun-Resistors; PROD_ID: RES-07856
R7 R8 R18 R52 R56 R57 R89 R93 R94 R126 R130 R131 = SparkFun-Resistors; PROD_ID: RES-07864
R9 R29 R41 R44 R78 R81 R115 R118 = SparkFun-Resistors; PROD_ID: RES-07828
R11 R14 R34 R47 R49 R67 R84 R86 R104 R121 R123 R141 = SparkFun-Resistors; PROD_ID: RES-07863
R26 R27 R65 R66 R102 R103 R139 R140 = SparkFun-Resistors; PROD_ID: RES-11132
R35 R36 R68 R74 R105 R111 R142 R148 = SparkFun-Resistors; PROD_ID: RES-07869
S1-S4 = SparkFun-Electromechanical; PROD_ID: SWCH-08247
SJ1-SJ16 = SparkFun-Passives
STANDOFF1-STANDOFF16 = SparkFun-Electromechanical
U1 U10 U16 U22 = SparkFun-DigitalIC; PROD_ID: IC-10040
U2-U4 U7-U9 U13-U15 U19-U21 = SparkFun-PowerIC; PROD_ID: VREG-08170
U5 U11 U17 U23 = SparkFun-DigitalIC; PROD_ID: IC-10023
U6 U12 U18 U24 = SparkFun-PowerIC; PROD_ID: VREG-00822
Y1-Y4 = SparkFun-FreqCtrl; PROD_ID: XTAL-08900

## Nets
3.3V: C7.1 C12.A U5.1 U6.5
3.3V1: C40.1 C41.A U11.1 U12.5
3.3V2: C61.1 C62.A U17.1 U18.5
3.3V3: C82.1 C83.A U23.1 U24.5
31/CAPRETURN1: R66.1 U10.59
31/CAPRETURN2: R27.1 U1.59
31/CAPRETURN3: R103.1 U16.59
31/CAPRETURN4: R140.1 U22.59
33/V1_3.3V: R7.1 U1.57
33/V1_3.3V1: R56.1 U10.57
33/V1_3.3V2: R93.1 U16.57
33/V1_3.3V3: R130.1 U22.57
35/V1_5V: R1.1 U1.55
35/V1_5V1: R53.1 U10.55
35/V1_5V2: R90.1 U16.55
35/V1_5V3: R127.1 U22.55
36/V2_3.3V: R8.1 U1.54
36/V2_3.3V1: R57.1 U10.54
36/V2_3.3V2: R94.1 U16.54
36/V2_3.3V3: R131.1 U22.54
37/V2_3.7V: R35.1 U1.53
37/V2_3.7V1: R68.1 U10.53
37/V2_3.7V2: R105.1 U16.53
37/V2_3.7V3: R142.1 U22.53
38/V2_4.2V: R34.1 U1.50
38/V2_4.2V1: R67.1 U10.50
38/V2_4.2V2: R104.1 U16.50
38/V2_4.2V3: R141.1 U22.50
39/V2_5V: R21.1 U1.70
39/V2_5V1: R60.1 U10.70
39/V2_5V2: R97.1 U16.70
39/V2_5V3: R134.1 U22.70
40/FAIL: R25.2 U1.52
40/FAIL1: R64.2 U10.52
40/FAIL2: R101.2 U16.52
40/FAIL3: R138.2 U22.52
41/PASS: R24.2 U1.51
41/PASS1: R63.2 U10.51
41/PASS2: R100.2 U16.51
41/PASS3: R137.2 U22.51
42/PT_FAIL: R23.2 U1.42
42/PT_FAIL1: R62.2 U10.42
42/PT_FAIL2: R99.2 U16.42
42/PT_FAIL3: R136.2 U22.42
43/PT_PASS: R22.2 U1.41
43/PT_PASS1: R61.2 U10.41
43/PT_PASS2: R98.2 U16.41
43/PT_PASS3: R135.2 U22.41
44/PT_CTRL: R13.1 R30.1 U1.40
44/PT_CTRL1: R42.1 R45.1 U10.40
44/PT_CTRL2: R79.1 R82.1 U16.40
44/PT_CTRL3: R116.1 R119.1 U22.40
45/CAPSENSE1: JP4.5 R26.2 U1.39
45/CAPSENSE2: JP12.5 R65.2 U10.39
45/CAPSENSE3: JP18.5 R102.2 U16.39
45/CAPSENSE4: JP24.5 R139.2 U22.39
46/CAPSENSE1: JP12.58 R66.2 U10.38
46/CAPSENSE2: JP4.58 R27.2 U1.38
46/CAPSENSE3: JP18.58 R103.2 U16.38
46/CAPSENSE4: JP24.58 R140.2 U22.38
47/CAPRETURN1: R26.1 U1.37
47/CAPRETURN2: R65.1 U10.37
47/CAPRETURN3: R102.1 U16.37
47/CAPRETURN4: R139.1 U22.37
48/PWR_CTRL1: R11.1 U1.36
48/PWR_CTRL2: R47.1 U10.36
48/PWR_CTRL3: R84.1 U16.36
48/PWR_CTRL4: R121.1 U22.36
49/PWR_CTRL1: R49.1 U10.35
49/PWR_CTRL2: R14.1 U1.35
49/PWR_CTRL3: R86.1 U16.35
49/PWR_CTRL4: R123.1 U22.35
A0: JP4.37 U1.97
A1: JP4.8 U1.96
A2: JP4.38 U1.95
A3: JP4.9 U1.94
A4: JP4.39 U1.93
A5: JP4.10 U1.92
A6: JP4.40 U1.91
A7: JP4.11 U1.90
A8: JP4.41 U1.89
A9: JP4.12 U1.88
A10: JP4.42 U1.87
A11: JP4.13 U1.86
A12: JP4.43 U1.85
A13: JP12.10 U10.92
A13/RAW_READ: U1.84
A13/RAW_READ1: U10.84
A13/RAW_READ2: U16.84
A13/RAW_READ3: U22.84
A14: JP12.39 U10.93
A14/PT_READ_V1: R3.1 R9.2 R13.2 U1.83
A14/PT_READ_V2: R40.1 R41.2 R42.2 U10.83
A14/PT_READ_V3: R77.1 R78.2 R79.2 U16.83
A14/PT_READ_V4: R114.1 R115.2 R116.2 U22.83
A15: JP12.9 U10.94
A15/PT_READ_V1: R43.1 R44.2 R45.2 U10.82
A15/PT_READ_V2: R28.1 R29.2 R30.2 U1.82
A15/PT_READ_V3: R80.1 R81.2 R82.2 U16.82
A15/PT_READ_V4: R117.1 R118.2 R119.2 U22.82
A16: JP12.38 U10.95
A17: JP12.8 U10.96
A18: JP12.37 U10.97
A19: JP12.43 U10.85
A20: JP12.13 U10.86
A21: JP12.42 U10.87
A22: JP12.12 U10.88
A23: JP12.41 U10.89
A24: JP12.40 U10.91
A25: JP12.11 U10.90
A26: JP18.10 U16.92
A27: JP18.39 U16.93
A28: JP18.9 U16.94
A29: JP18.38 U16.95
A30: JP18.8 U16.96
A31: JP18.37 U16.97
A32: JP18.43 U16.85
A33: JP18.13 U16.86
A34: JP18.42 U16.87
A35: JP18.12 U16.88
A36: JP18.41 U16.89
A37: JP18.40 U16.91
A38: JP18.11 U16.90
A39: JP24.10 U22.92
A40: JP24.39 U22.93
A41: JP24.9 U22.94
A42: JP24.38 U22.95
A43: JP24.8 U22.96
A44: JP24.37 U22.97
A45: JP24.43 U22.85
A46: JP24.13 U22.86
A47: JP24.42 U22.87
A48: JP24.12 U22.88
A49: JP24.41 U22.89
A50: JP24.40 U22.91
A51: JP24.11 U22.90
AREF: C1.2 U1.98
AREF1: C16.2 U10.98
AREF2: C43.2 U16.98
AREF3: C64.2 U22.98
D1: JP12.47 U10.18
D2: JP4.14 U1.6
D3: JP4.44 U1.7
D4: JP4.15 U1.1
D5: JP4.45 U1.5
D6: JP4.16 U1.15
D7: JP4.46 U1.16
D8: JP4.17 U1.17
D9: JP4.47 U1.18
D10: JP4.18 U1.23
D11: JP4.48 U1.24
D12: JP4.19 U1.25
D13: JP4.49 R6.1 U1.26
D14: JP12.17 U10.17
D15: JP12.46 U10.16
D16: JP12.16 U10.15
D17: JP12.15 U10.1
D18: JP12.45 U10.5
D19: JP12.14 U10.6
D20: JP12.44 U10.7
D21: JP12.28 U10.60
D22: JP4.24 U1.78
D23: JP4.54 U1.77
D24: JP4.25 U1.76
D25: JP4.55 U1.75
D26: JP4.26 U1.74
D27: JP4.56 U1.73
D28: JP4.27 U1.72
D29: JP4.57 U1.71
D30: JP4.28 U1.60
D31: JP12.18 U10.23
D32: JP12.48 U10.24
D33: JP12.19 U10.25
D34: JP12.49 R39.1 U10.26
D35: JP12.24 U10.78
D36: JP12.25 U10.76
D37: JP12.55 U10.75
D38: JP12.26 U10.74
D39: JP12.56 U10.73
D40: JP12.27 U10.72
D41: JP12.57 U10.71
D42: JP12.54 U10.77
D43: JP18.47 U16.18
D44: JP18.17 U16.17
D45: JP18.46 U16.16
D46: JP18.16 U16.15
D47: JP18.15 U16.1
D48: JP18.45 U16.5
D49: JP18.14 U16.6
D50: JP18.44 U16.7
D51: JP18.28 U16.60
D52: JP18.18 U16.23
D53: JP18.48 U16.24
D54: JP18.19 U16.25
D55: JP18.49 R76.1 U16.26
D56: JP18.24 U16.78
D57: JP18.25 U16.76
D58: JP18.55 U16.75
D59: JP18.26 U16.74
D60: JP18.56 U16.73
D61: JP18.27 U16.72
D62: JP18.57 U16.71
D63: JP18.54 U16.77
D64: JP24.47 U22.18
D65: JP24.17 U22.17
D66: JP24.46 U22.16
D67: JP24.16 U22.15
D68: JP24.15 U22.1
D69: JP24.45 U22.5
D70: JP24.14 U22.6
D71: JP24.44 U22.7
D72: JP24.28 U22.60
D73: JP24.18 U22.23
D74: JP24.48 U22.24
D75: JP24.19 U22.25
D76: JP24.49 R113.1 U22.26
D77: JP24.24 U22.78
D78: JP24.25 U22.76
D79: JP24.55 U22.75
D80: JP24.26 U22.74
D81: JP24.56 U22.73
D82: JP24.27 U22.72
D83: JP24.57 U22.71
D84: JP24.54 U22.77
DTR: C2.2 JP2.1
DTR1: C23.2 JP11.1
DTR2: C44.2 JP17.1
DTR3: C65.2 JP23.1
EN_I2C: U1.47 U5.8
EN_I2C1: U10.47 U11.8
EN_I2C2: U16.47 U17.8
EN_I2C3: U22.47 U23.8
FTDI_VCC: JP2.4 Q1.1 Q6.1 R32.2 R37.2
FTDI_VCC1: JP11.4 Q11.1 Q12.1 R70.2 R72.2
FTDI_VCC2: JP17.4 Q17.1 Q18.1 R107.2 R109.2
FTDI_VCC3: JP23.4 Q23.1 Q24.1 R144.2 R146.2
GND: C1.1 C3.- C4.2 C5.C C6.C C7.2 C8.- C9.2 C10.C C11.C C12.K C13.2 C14.C C15.C C17.2 C18.2 C19.1 C20.2 C21.1 C22.1 D1.C D3.C D4.C D6.C JP1.GND JP1.GNDBREAK JP2.5 JP2.6 JP3.6 JP4.1 JP4.31 Q2.2 Q4.2 R9.1 R15.1 R18.1 R29.1 S1.1 S1.2 U1.11 U1.32 U1.62 U1.81 U1.99 U5.4 U6.2 Y1.2
GND1: C16.1 C24.- C25.- C26.2 C27.C C28.C C29.2 C30.C C31.C C32.2 C33.C C34.C C35.2 C36.2 C37.1 C38.1 C39.1 C40.2 C41.K C42.2 D2.C D7.C D8.C D10.C JP9.GND JP9.GNDBREAK JP10.6 JP11.5 JP11.6 JP12.1 JP12.31 Q7.2 Q9.2 R41.1 R44.1 R50.1 R52.1 S2.1 S2.2 U10.11 U10.32 U10.62 U10.81 U10.99 U11.4 U12.2 Y2.2
GND2: C43.1 C45.- C46.- C47.2 C48.C C49.C C50.2 C51.C C52.C C53.2 C54.C C55.C C56.2 C57.2 C58.1 C59.1 C60.1 C61.2 C62.K C63.2 D11.C D12.C D13.C D15.C JP15.GND JP15.GNDBREAK JP16.6 JP17.5 JP17.6 JP18.1 JP18.31 Q13.2 Q15.2 R78.1 R81.1 R87.1 R89.1 S3.1 S3.2 U16.11 U16.32 U16.62 U16.81 U16.99 U17.4 U18.2 Y3.2
GND3: C64.1 C66.- C67.- C68.2 C69.C C70.C C71.2 C72.C C73.C C74.2 C75.C C76.C C77.2 C78.2 C79.1 C80.1 C81.1 C82.2 C83.K C84.2 D16.C D17.C D18.C D20.C JP21.GND JP21.GNDBREAK JP22.6 JP23.5 JP23.6 JP24.1 JP24.31 Q19.2 Q21.2 R115.1 R118.1 R124.1 R126.1 S4.1 S4.2 U22.11 U22.32 U22.62 U22.81 U22.99 U23.4 U24.2 Y4.2
N$1: R34.2 R36.1
N$2: U1.44 U5.5
N$3: R16.1 SJ2.2 U2.1
N$4: D3.A R6.2
N$5: D1.A R5.1
N$6: JP4.7 R22.1
N$7: JP4.36 R23.1
N$8: Q2.1 R11.2
N$9: R1.2 R4.1 R7.2 U3.1
N$10: R8.2 R19.1 R21.2 R35.2 R36.2 U4.1
N$11: D4.A R20.1
N$12: Q2.3 Q3.1 R10.1
N$13: Q4.1 R14.2
N$14: Q4.3 Q5.1 R12.1
N$15: D5.C F1.1 SJ1.1
N$16: JP2.3 Q1.2 R32.1
N$17: R18.2 SJ2.1
N$18: R15.2 SJ2.3
N$19: JP4.6 R24.1
N$20: JP4.35 R25.1
N$21: C4.1 C5.A R4.2 SJ3.3 U3.2 U3.4
N$22: C3.+ Q3.3 R10.2 SJ3.2
N$23: C8.+ Q5.3 R12.2 SJ4.2
N$24: D5.A JP1.PWR
N$25: D6.A R31.2
N$26: JP2.2 Q6.2 R37.1
N$27: U1.43 U5.6
N$28: C20.1 U6.4
N$29: Q7.1 R47.2
N$30: Q7.3 Q8.1 R46.1
N$31: Q9.1 R49.2
N$32: Q9.3 Q10.1 R48.1
N$33: D9.C F2.1 SJ5.1
N$34: R51.1 SJ6.2 U7.1
N$35: R52.2 SJ6.1
N$36: R50.2 SJ6.3
N$37: D7.A R55.1
N$38: R53.2 R54.1 R56.2 U8.1
N$39: R57.2 R58.1 R60.2 R68.2 R74.2 U9.1
N$40: D8.A R59.1
N$41: C29.1 C30.A R54.2 SJ7.3 U8.2 U8.4
N$42: C24.+ Q8.3 R46.2 SJ7.2
N$43: C25.+ Q10.3 R48.2 SJ8.2
N$44: D9.A JP9.PWR
N$45: U10.33 Y2.3
N$46: U10.34 Y2.1
N$47: D2.A R39.2
N$48: JP12.7 R61.1
N$49: JP12.36 R62.1
N$50: JP12.6 R63.1
N$51: JP12.35 R64.1
N$52: D10.A R69.2
N$53: JP11.3 Q12.2 R72.1
N$54: JP11.2 Q11.2 R70.1
N$55: R67.2 R74.1
N$56: U10.44 U11.5
N$57: U10.43 U11.6
N$58: C42.1 U12.4
N$59: Q13.1 R84.2
N$60: Q13.3 Q14.1 R83.1
N$61: Q15.1 R86.2
N$62: Q15.3 Q16.1 R85.1
N$63: D14.C F3.1 SJ9.1
N$64: R88.1 SJ10.2 U13.1
N$65: R89.2 SJ10.1
N$66: R87.2 SJ10.3
N$67: D12.A R92.1
N$68: R90.2 R91.1 R93.2 U14.1
N$69: R94.2 R95.1 R97.2 R105.2 R111.2 U15.1
N$70: D13.A R96.1
N$71: C50.1 C51.A R91.2 SJ11.3 U14.2 U14.4
N$72: C45.+ Q14.3 R83.2 SJ11.2
N$73: U1.33 Y1.3
N$74: U1.34 Y1.1
N$75: C46.+ Q16.3 R85.2 SJ12.2
N$76: D14.A JP15.PWR
N$77: U16.33 Y3.3
N$78: U16.34 Y3.1
N$79: D11.A R76.2
N$80: JP18.7 R98.1
N$81: JP18.36 R99.1
N$82: JP18.6 R100.1
N$83: JP18.35 R101.1
N$84: D15.A R106.2
N$85: JP17.3 Q18.2 R109.1
N$86: JP17.2 Q17.2 R107.1
N$87: R104.2 R111.1
N$88: U16.44 U17.5
N$89: U16.43 U17.6
N$90: C63.1 U18.4
N$91: Q19.1 R121.2
N$92: Q19.3 Q20.1 R120.1
N$93: Q21.1 R123.2
N$94: Q21.3 Q22.1 R122.1
N$95: D19.C F4.1 SJ13.1
N$96: R125.1 SJ14.2 U19.1
N$97: R126.2 SJ14.1
N$98: R124.2 SJ14.3
N$99: D17.A R129.1
N$100: R127.2 R128.1 R130.2 U20.1
N$101: R131.2 R132.1 R134.2 R142.2 R148.2 U21.1
N$102: D18.A R133.1
N$103: C71.1 C72.A R128.2 SJ15.3 U20.2 U20.4
N$104: C66.+ Q20.3 R120.2 SJ15.2
N$105: C67.+ Q22.3 R122.2 SJ16.2
N$106: D19.A JP21.PWR
N$107: U22.33 Y4.3
N$108: U22.34 Y4.1
N$109: D16.A R113.2
N$110: JP24.7 R135.1
N$111: JP24.36 R136.1
N$112: JP24.6 R137.1
N$113: JP24.35 R138.1
N$114: D20.A R143.2
N$115: JP23.3 Q24.2 R146.1
N$116: JP23.2 Q23.2 R144.1
N$117: R141.2 R148.1
N$118: U22.44 U23.5
N$119: U22.43 U23.6
N$120: C84.1 U24.4
PB0: JP4.60 U1.19
PB1: JP3.3 JP4.30 U1.20
PB2: JP3.4 JP4.59 U1.21
PB3: JP3.1 JP4.29 U1.22
PB4: JP12.60 U10.19
PB5: JP10.3 JP12.30 U10.20
PB6: JP10.4 JP12.59 U10.21
PB7: JP10.1 JP12.29 U10.22
PB8: JP18.60 U16.19
PB9: JP16.3 JP18.30 U16.20
PB10: JP16.4 JP18.59 U16.21
PB11: JP16.1 JP18.29 U16.22
PB12: JP24.60 U22.19
PB13: JP22.3 JP24.30 U22.20
PB14: JP22.4 JP24.59 U22.21
PB15: JP22.1 JP24.29 U22.22
PC1: U10.58
PC2: U16.58
PC3: U22.58
PC5: U1.58
RAW [BIG]: C6.A C11.A C15.A F1.2 JP4.4 JP4.34 SJ1.2 SJ3.1 SJ4.1 U2.3 U3.3 U4.3 U6.1 U6.3
RAW1 [BIG]: C28.A C31.A C34.A F2.2 JP12.4 JP12.34 SJ5.2 SJ7.1 SJ8.1 U7.3 U8.3 U9.3 U12.1 U12.3
RAW2 [BIG]: C49.A C52.A C55.A F3.2 JP18.4 JP18.34 SJ9.2 SJ11.1 SJ12.1 U13.3 U14.3 U15.3 U18.1 U18.3
RAW3 [BIG]: C70.A C73.A C76.A F4.2 JP24.4 JP24.34 SJ13.2 SJ15.1 SJ16.1 U19.3 U20.3 U21.3 U24.1 U24.3
RESET: C2.1 JP3.5 R2.1 S1.3 S1.4 U1.30
RESET1: C23.1 JP10.5 R38.1 S2.3 S2.4 U10.30
RESET2: C44.1 JP16.5 R75.1 S3.3 S3.4 U16.30
RESET3: C65.1 JP22.5 R112.1 S4.3 S4.4 U22.30
RX0: Q1.3 R33.1 U1.2
RX1: JP4.52 U1.45
RX2: JP4.51 U1.12
RX3: JP4.50 U1.63
RX4: JP12.50 U10.63
RX5: JP12.51 U10.12
RX6: Q12.3 R73.1 U10.2
RX7: JP12.52 U10.45
RX8: JP18.50 U16.63
RX9: JP18.51 U16.12
RX10: Q18.3 R110.1 U16.2
RX11: JP18.52 U16.45
RX12: JP24.50 U22.63
RX13: JP24.51 U22.12
RX14: Q24.3 R147.1 U22.2
RX15: JP24.52 U22.45
SCL1: JP4.53 U5.2
SCL2: JP12.53 U11.2
SCL3: JP18.53 U17.2
SCL4: JP24.53 U23.2
SDA1: JP4.23 U5.3
SDA2: JP12.23 U11.3
SDA3: JP18.23 U17.3
SDA4: JP24.23 U23.3
TX0: Q6.3 R17.1 U1.3
TX1: JP4.22 U1.46
TX2: JP4.21 U1.13
TX3: JP4.20 U1.64
TX4: JP12.20 U10.64
TX5: JP12.21 U10.13
TX6: JP12.22 U10.46
TX7: Q11.3 R71.1 U10.3
TX8: JP18.20 U16.64
TX9: JP18.21 U16.13
TX10: JP18.22 U16.46
TX11: Q17.3 R108.1 U16.3
TX12: JP24.20 U22.64
TX13: JP24.21 U22.13
TX14: JP24.22 U22.46
TX15: Q23.3 R145.1 U22.3
V1 [BIG]: C17.1 JP4.2 JP4.32 Q3.2 R3.2 R5.2
V2: C18.1 JP4.3 JP4.33 Q5.2 R20.2 R28.2
V3 [BIG]: C35.1 JP12.2 JP12.32 Q8.2 R40.2 R55.2
V4: C36.1 JP12.3 JP12.33 Q10.2 R43.2 R59.2
V5 [BIG]: C56.1 JP18.2 JP18.32 Q14.2 R77.2 R92.2
V6: C57.1 JP18.3 JP18.33 Q16.2 R80.2 R96.2
V7 [BIG]: C77.1 JP24.2 JP24.32 Q20.2 R114.2 R129.2
V8: C78.1 JP24.3 JP24.33 Q22.2 R117.2 R133.2
VCC [POWER]: C9.1 C10.A C19.2 C21.2 C22.2 JP3.2 R2.2 R16.2 R17.2 R31.1 R33.2 U1.10 U1.31 U1.61 U1.80 U1.100 U2.2 U2.4 U5.7
VCC1 [POWER]: C26.1 C27.A C37.2 C38.2 C39.2 JP10.2 R38.2 R51.2 R69.1 R71.2 R73.2 U7.2 U7.4 U10.10 U10.31 U10.61 U10.80 U10.100 U11.7
VCC2 [POWER]: C47.1 C48.A C58.2 C59.2 C60.2 JP16.2 R75.2 R88.2 R106.1 R108.2 R110.2 U13.2 U13.4 U16.10 U16.31 U16.61 U16.80 U16.100 U17.7
VCC3 [POWER]: C68.1 C69.A C79.2 C80.2 C81.2 JP22.2 R112.2 R125.2 R143.1 R145.2 R147.2 U19.2 U19.4 U22.10 U22.31 U22.61 U22.80 U22.100 U23.7
VREG2OUT: C13.1 C14.A R19.2 SJ4.3 U4.2 U4.4
VREG2OUT1: C32.1 C33.A R58.2 SJ8.3 U9.2 U9.4
VREG2OUT2: C53.1 C54.A R95.2 SJ12.3 U15.2 U15.4
VREG2OUT3: C74.1 C75.A R132.2 SJ16.3 U21.2 U21.4

## Tracks (layer width: path | path; a pad name or v marks a point on that pad's centre or on a via)
3.3V  (via drill 0.51)
  Top 0.254: U5.1 73.62,34.55 v75.62,36.55 75.19,36.97 C7.1
  Top 0.279: U6.5 36.26,56.58 36.58,56.9 36.58,58.84 | 36.58,58.84 C12.A | 36.58,58.84 36.58,59.56 37.97,60.96 37.97,67.67 v37.9,67.73
  Bottom 0.254: 75.18,43.56 75.18,36.98 v75.62,36.55
  Bottom 0.279: 75.18,43.56 76.2,44.58 76.2,51.56 74.68,53.09 74.68,53.72 71.63,56.77 67.44,56.77 63.12,61.09 63.12,62.86 58.93,67.06 38.58,67.06 v37.9,67.73
3.3V1  (via drill 0.51)
  Top 0.254: U11.1 147.78,34.55 v149.78,36.55 149.36,36.97 C40.1
  Top 0.279: U12.5 110.42,56.58 110.74,56.9 110.74,58.84 | 110.74,58.84 C41.A | 110.74,58.84 110.74,59.56 112.14,60.96 112.14,67.67 v112.07,67.73
  Bottom 0.254: 149.35,43.56 149.35,36.98 v149.78,36.55
  Bottom 0.279: 149.35,43.56 150.37,44.58 150.37,51.56 148.84,53.09 148.84,53.72 145.8,56.77 141.61,56.77 137.29,61.09 137.29,62.86 133.1,67.06 112.75,67.06 v112.07,67.73
3.3V2  (via drill 0.51)
  Top 0.254: U17.1 73.62,110.24 v75.62,112.24 75.19,112.66 C61.1
  Top 0.279: U18.5 36.26,132.27 36.58,132.59 36.58,134.53 | 36.58,134.53 C62.A | 36.58,134.53 36.58,135.25 37.97,136.65 37.97,143.36 v37.9,143.43
  Bottom 0.254: 75.18,119.25 75.18,112.67 v75.62,112.24
  Bottom 0.279: 75.18,119.25 76.2,120.27 76.2,127.25 74.68,128.78 74.68,129.41 71.63,132.46 67.44,132.46 63.12,136.78 63.12,138.56 58.93,142.75 38.58,142.75 v37.9,143.43
3.3V3  (via drill 0.51)
  Top 0.254: U23.1 147.78,110.24 v149.78,112.24 149.36,112.66 C82.1
  Top 0.279: U24.5 110.42,132.27 110.74,132.59 110.74,134.53 | 110.74,134.53 C83.A | 110.74,134.53 110.74,135.25 112.14,136.65 112.14,143.36 v112.07,143.43
  Bottom 0.254: 149.35,119.25 149.35,112.67 v149.78,112.24
  Bottom 0.279: 149.35,119.25 150.37,120.27 150.37,127.25 148.84,128.78 148.84,129.41 145.8,132.46 141.61,132.46 137.29,136.78 137.29,138.56 133.1,142.75 112.75,142.75 v112.07,143.43
31/CAPRETURN1  (via drill 0.51)
  Top 0.279: U10.59 141.55,47.29 v142.11,47.29 | R66.1 144.11,17.9 143.43,18.57 143.43,19.28 v143.99,19.84
  Bottom 0.254: 145.03,45.9 145.41,46.28 145.41,48.08 144.47,49.02 143.38,49.02 142.04,47.68 v142.11,47.29 | 144.97,34.9 144.97,34.18 143.18,32.38 143.18,31.32 142.83,30.96 142.83,27.33
  Bottom 0.279: 145.03,45.9 144.91,45.77 144.93,40.41 145.95,39.39 145.97,36.45 144.97,35.55 144.97,34.9 | 142.83,27.94 142.83,27.33 142.83,21 v143.99,19.84
31/CAPRETURN2  (via drill 0.51)
  Top 0.279: U1.59 67.38,47.29 v67.95,47.29 | R27.1 69.94,17.9 69.27,18.57 69.27,19.28 v69.83,19.84
  Bottom 0.254: 70.87,45.9 71.25,46.28 71.25,48.08 70.31,49.02 69.22,49.02 67.87,47.68 v67.95,47.29 | 70.8,34.9 70.8,34.18 69.01,32.38 69.01,31.32 68.66,30.96 68.66,27.33
  Bottom 0.279: 70.87,45.9 70.74,45.77 70.76,40.41 71.78,39.39 71.81,36.45 70.8,35.55 70.8,34.9 | 68.66,27.94 68.66,27.33 68.66,21 v69.83,19.84
31/CAPRETURN3  (via drill 0.51)
  Top 0.279: U16.59 67.38,122.99 v67.95,122.99 | R103.1 69.94,93.59 69.27,94.26 69.27,94.97 v69.83,95.53
  Bottom 0.254: 70.87,121.59 71.25,121.97 71.25,123.77 70.31,124.71 69.22,124.71 67.87,123.37 v67.95,122.99 | 70.8,110.59 70.8,109.87 69.01,108.08 69.01,107.01 68.66,106.66 68.66,103.02
  Bottom 0.279: 70.87,121.59 70.74,121.46 70.76,116.1 71.78,115.09 71.81,112.14 70.8,111.24 70.8,110.59 | 68.66,103.63 68.66,103.02 68.66,96.7 v69.83,95.53
31/CAPRETURN4  (via drill 0.51)
  Top 0.279: U22.59 141.55,122.99 v142.11,122.99 | R140.1 144.11,93.59 143.43,94.26 143.43,94.97 v143.99,95.53
  Bottom 0.254: 145.03,121.59 145.41,121.97 145.41,123.77 144.47,124.71 143.38,124.71 142.04,123.37 v142.11,122.99 | 144.97,110.59 144.97,109.87 143.18,108.08 143.18,107.01 142.83,106.66 142.83,103.02
  Bottom 0.279: 145.03,121.59 144.91,121.46 144.93,116.1 145.95,115.09 145.97,112.14 144.97,111.24 144.97,110.59 | 142.83,103.63 142.83,103.02 142.83,96.7 v143.99,95.53
33/V1_3.3V  (via drill 0.51)
  Top 0.279: U1.57 67.9,46.41 70.54,46.41 71.63,47.5 71.63,50.16 v73.53,52.07
  Top 0.305: v17.02,61.01 17.02,59.75 R7.1
  Bottom 0.279: v73.53,52.07 72.44,52.07 71.84,52.67
  Bottom 0.305: 71.84,52.67 71.7,52.81 67.26,52.81 61.19,58.88 61.19,62.2 58.6,64.8 37.03,64.8 35.61,66.22 35.61,67 34.24,68.38 31.65,68.38 28.4,65.13 21.13,65.13 v17.02,61.01
33/V1_3.3V1  (via drill 0.51)
  Top 0.279: U10.57 142.07,46.41 144.7,46.41 145.8,47.5 145.8,50.16 v147.7,52.07
  Top 0.305: v91.19,61.01 91.19,59.75 R56.1
  Bottom 0.279: v147.7,52.07 146.61,52.07 146.01,52.67
  Bottom 0.305: 146.01,52.67 145.87,52.81 141.43,52.81 135.36,58.88 135.36,62.2 132.77,64.8 111.2,64.8 109.78,66.22 109.78,67 108.41,68.38 105.82,68.38 102.56,65.13 95.3,65.13 v91.19,61.01
33/V1_3.3V2  (via drill 0.51)
  Top 0.279: U16.57 67.9,122.1 70.54,122.1 71.63,123.19 71.63,125.86 v73.53,127.76
  Top 0.305: v17.02,136.7 17.02,135.44 R93.1
  Bottom 0.279: v73.53,127.76 72.44,127.76 71.84,128.36
  Bottom 0.305: 71.84,128.36 71.7,128.5 67.26,128.5 61.19,134.57 61.19,137.9 58.6,140.49 37.03,140.49 35.61,141.91 35.61,142.7 34.24,144.07 31.65,144.07 28.4,140.82 21.13,140.82 v17.02,136.7
33/V1_3.3V3  (via drill 0.51)
  Top 0.279: U22.57 142.07,122.1 144.7,122.1 145.8,123.19 145.8,125.86 v147.7,127.76
  Top 0.305: v91.19,136.7 91.19,135.44 R130.1
  Bottom 0.279: v147.7,127.76 146.61,127.76 146.01,128.36
  Bottom 0.305: 146.01,128.36 145.87,128.5 141.43,128.5 135.36,134.57 135.36,137.9 132.77,140.49 111.2,140.49 109.78,141.91 109.78,142.7 108.41,144.07 105.82,144.07 102.56,140.82 95.3,140.82 v91.19,136.7
35/V1_5V  (via drill 0.51)
  Top 0.279: U1.55 68.12,45.21 71.12,45.21 72.9,46.99 72.9,48.34 v73.84,49.28
  Top 0.305: 19.82,59.78 v20.12,60.07 19.7,59.65 R1.1
  Bottom 0.279: 71.25,51.49 73.46,49.28 v73.84,49.28
  Bottom 0.305: 71.25,51.49 66.85,51.49 59.94,58.39 59.94,61.75 58.14,63.55 36.47,63.55 34.31,65.71 34.31,66.45 33.38,67.39 31.52,67.39 28.65,64.52 24.56,64.52 v20.12,60.07
35/V1_5V1  (via drill 0.51)
  Top 0.279: U10.55 142.29,45.21 145.29,45.21 147.07,46.99 147.07,48.34 v148.01,49.28
  Top 0.305: 93.99,59.78 v94.29,60.07 93.87,59.65 R53.1
  Bottom 0.279: 145.41,51.49 147.62,49.28 v148.01,49.28
  Bottom 0.305: 145.41,51.49 141.02,51.49 134.11,58.39 134.11,61.75 132.31,63.55 110.64,63.55 108.48,65.71 108.48,66.45 107.54,67.39 105.69,67.39 102.82,64.52 98.73,64.52 v94.29,60.07
35/V1_5V2  (via drill 0.51)
  Top 0.279: U16.55 68.12,120.9 71.12,120.9 72.9,122.68 72.9,124.03 v73.84,124.97
  Top 0.305: 19.82,135.47 v20.12,135.76 19.7,135.34 R90.1
  Bottom 0.279: 71.25,127.18 73.46,124.97 v73.84,124.97
  Bottom 0.305: 71.25,127.18 66.85,127.18 59.94,134.09 59.94,137.44 58.14,139.24 36.47,139.24 34.31,141.4 34.31,142.14 33.38,143.08 31.52,143.08 28.65,140.21 24.56,140.21 v20.12,135.76
35/V1_5V3  (via drill 0.51)
  Top 0.279: U22.55 142.29,120.9 145.29,120.9 147.07,122.68 147.07,124.03 v148.01,124.97
  Top 0.305: 93.99,135.47 v94.29,135.76 93.87,135.34 R127.1
  Bottom 0.279: 145.41,127.18 147.62,124.97 v148.01,124.97
  Bottom 0.305: 145.41,127.18 141.02,127.18 134.11,134.09 134.11,137.44 132.31,139.24 110.64,139.24 108.48,141.4 108.48,142.14 107.54,143.08 105.69,143.08 102.82,140.21 98.73,140.21 v94.29,135.76
36/V2_3.3V  (via drill 0.51)
  Top 0.279: U1.54 68.17,44.55 | 70.54,44.55 71.35,44.55 73.41,46.61 73.41,47.5 v73.91,48.01
  Top 0.305: 68.17,44.55 70.54,44.55 | R8.1 30.61,61.19 30.61,61.98 32.18,63.55 v34.06,63.55
  Bottom 0.254: 72.95,48.89 71.02,50.82 68.56,50.82
  Bottom 0.279: 72.95,48.89 73.84,48.01 v73.91,48.01
  Bottom 0.305: 68.56,50.82 66.62,50.82 59.33,58.11 59.33,61.47 57.86,62.94 36.2,62.94 35.59,63.55 v34.06,63.55
36/V2_3.3V1  (via drill 0.51)
  Top 0.279: U10.54 142.34,44.55 | 144.7,44.55 145.52,44.55 147.57,46.61 147.57,47.5 v148.08,48.01
  Top 0.305: 142.34,44.55 144.7,44.55 | R57.1 104.78,61.19 104.78,61.98 106.35,63.55 v108.23,63.55
  Bottom 0.254: 147.12,48.89 145.19,50.82 142.72,50.82
  Bottom 0.279: 147.12,48.89 148.01,48.01 v148.08,48.01
  Bottom 0.305: 142.72,50.82 140.79,50.82 133.5,58.11 133.5,61.47 132.03,62.94 110.36,62.94 109.75,63.55 v108.23,63.55
36/V2_3.3V2  (via drill 0.51)
  Top 0.279: U16.54 68.17,120.24 | 70.54,120.24 71.35,120.24 73.41,122.3 73.41,123.19 v73.91,123.7
  Top 0.305: 68.17,120.24 70.54,120.24 | R94.1 30.61,136.88 30.61,137.67 32.18,139.24 v34.06,139.24
  Bottom 0.254: 72.95,124.59 71.02,126.52 68.56,126.52
  Bottom 0.279: 72.95,124.59 73.84,123.7 v73.91,123.7
  Bottom 0.305: 68.56,126.52 66.62,126.52 59.33,133.81 59.33,137.16 57.86,138.63 36.2,138.63 35.59,139.24 v34.06,139.24
36/V2_3.3V3  (via drill 0.51)
  Top 0.279: U22.54 142.34,120.24 | 144.7,120.24 145.52,120.24 147.57,122.3 147.57,123.19 v148.08,123.7
  Top 0.305: 142.34,120.24 144.7,120.24 | R131.1 104.78,136.88 104.78,137.67 106.35,139.24 v108.23,139.24
  Bottom 0.254: 147.12,124.59 145.19,126.52 142.72,126.52
  Bottom 0.279: 147.12,124.59 148.01,123.7 v148.08,123.7
  Bottom 0.305: 142.72,126.52 140.79,126.52 133.5,133.81 133.5,137.16 132.03,138.63 110.36,138.63 109.75,139.24 v108.23,139.24
37/V2_3.7V  (via drill 0.51)
  Top 0.279: U1.53 68.27,43.94 | 70.28,43.94 71.58,43.94 v74.35,46.71
  Top 0.305: 68.27,43.94 70.28,43.94 | R35.1 32.07,62.04 32.56,62.53 v35.1,62.53
  Bottom 0.254: 68.63,50.22 70.81,50.22 72.42,48.62
  Bottom 0.279: 72.42,48.62 72.42,47.73 73.43,46.71 v74.35,46.71
  Bottom 0.305: 68.63,50.22 66.34,50.22 58.65,57.91 58.65,61.06 57.45,62.25 35.38,62.25 v35.1,62.53
37/V2_3.7V1  (via drill 0.51)
  Top 0.279: U10.53 142.44,43.94 | 144.45,43.94 145.75,43.94 v148.51,46.71
  Top 0.305: 142.44,43.94 144.45,43.94 | R68.1 106.23,62.04 106.73,62.53 v109.27,62.53
  Bottom 0.254: 142.8,50.22 144.98,50.22 146.58,48.62
  Bottom 0.279: 146.58,48.62 146.58,47.73 147.6,46.71 v148.51,46.71
  Bottom 0.305: 142.8,50.22 140.51,50.22 132.82,57.91 132.82,61.06 131.62,62.25 109.55,62.25 v109.27,62.53
37/V2_3.7V2  (via drill 0.51)
  Top 0.279: U16.53 68.27,119.63 | 70.28,119.63 71.58,119.63 v74.35,122.4
  Top 0.305: 68.27,119.63 70.28,119.63 | R105.1 32.07,137.73 32.56,138.23 v35.1,138.23
  Bottom 0.254: 68.63,125.91 70.81,125.91 72.42,124.31
  Bottom 0.279: 72.42,124.31 72.42,123.42 73.43,122.4 v74.35,122.4
  Bottom 0.305: 68.63,125.91 66.34,125.91 58.65,133.6 58.65,136.75 57.45,137.95 35.38,137.95 v35.1,138.23
37/V2_3.7V3  (via drill 0.51)
  Top 0.279: U22.53 142.44,119.63 | 144.45,119.63 145.75,119.63 v148.51,122.4
  Top 0.305: 142.44,119.63 144.45,119.63 | R142.1 106.23,137.73 106.73,138.23 v109.27,138.23
  Bottom 0.254: 142.8,125.91 144.98,125.91 146.58,124.31
  Bottom 0.279: 146.58,124.31 146.58,123.42 147.6,122.4 v148.51,122.4
  Bottom 0.305: 142.8,125.91 140.51,125.91 132.82,133.6 132.82,136.75 131.62,137.95 109.55,137.95 v109.27,138.23
38/V2_4.2V  (via drill 0.51)
  Top 0.279: U1.50 68.55,39.98 69.16,39.98 69.49,40.31 v72.26,40.31
  Top 0.305: v32.77,66.17 32.77,64.8 R34.1
  Bottom 0.254: 71.83,46.08 71.83,48.39 70.61,49.61 68.86,49.61
  Bottom 0.279: 71.83,46.08 71.83,40.74 v72.26,40.31
  Bottom 0.305: 68.86,49.61 66.04,49.61 57.99,57.66 57.99,60.78 57.2,61.57 33.93,61.57 32.77,62.74 v32.77,66.17
38/V2_4.2V1  (via drill 0.51)
  Top 0.279: U10.50 142.72,39.98 143.33,39.98 143.66,40.31 v146.43,40.31
  Top 0.305: v106.93,66.17 106.93,64.8 R67.1
  Bottom 0.254: 146,46.08 146,48.39 144.78,49.61 143.03,49.61
  Bottom 0.279: 146,46.08 146,40.74 v146.43,40.31
  Bottom 0.305: 143.03,49.61 140.21,49.61 132.16,57.66 132.16,60.78 131.37,61.57 108.1,61.57 106.93,62.74 v106.93,66.17
38/V2_4.2V2  (via drill 0.51)
  Top 0.279: U16.50 68.55,115.67 69.16,115.67 69.49,116 v72.26,116
  Top 0.305: v32.77,141.86 32.77,140.49 R104.1
  Bottom 0.254: 71.83,121.77 71.83,124.08 70.61,125.3 68.86,125.3
  Bottom 0.279: 71.83,121.77 71.83,116.43 v72.26,116
  Bottom 0.305: 68.86,125.3 66.04,125.3 57.99,133.35 57.99,136.47 57.2,137.26 33.93,137.26 32.77,138.43 v32.77,141.86
38/V2_4.2V3  (via drill 0.51)
  Top 0.279: U22.50 142.72,115.67 143.33,115.67 143.66,116 v146.43,116
  Top 0.305: v106.93,141.86 106.93,140.49 R141.1
  Bottom 0.254: 146,121.77 146,124.08 144.78,125.3 143.03,125.3
  Bottom 0.279: 146,121.77 146,116.43 v146.43,116
  Bottom 0.305: 143.03,125.3 140.21,125.3 132.16,133.35 132.16,136.47 131.37,137.26 108.1,137.26 106.93,138.43 v106.93,141.86
39/V2_5V  (via drill 0.51)
  Top 0.279: U1.70 66.28,53.97 | 35.72,61.12 36.98,62.38 v36.98,66.55